# EAGLE board Sequencer-Logic-Prod-V2.1l (EAGLE 9.6.2), part 1 of 2
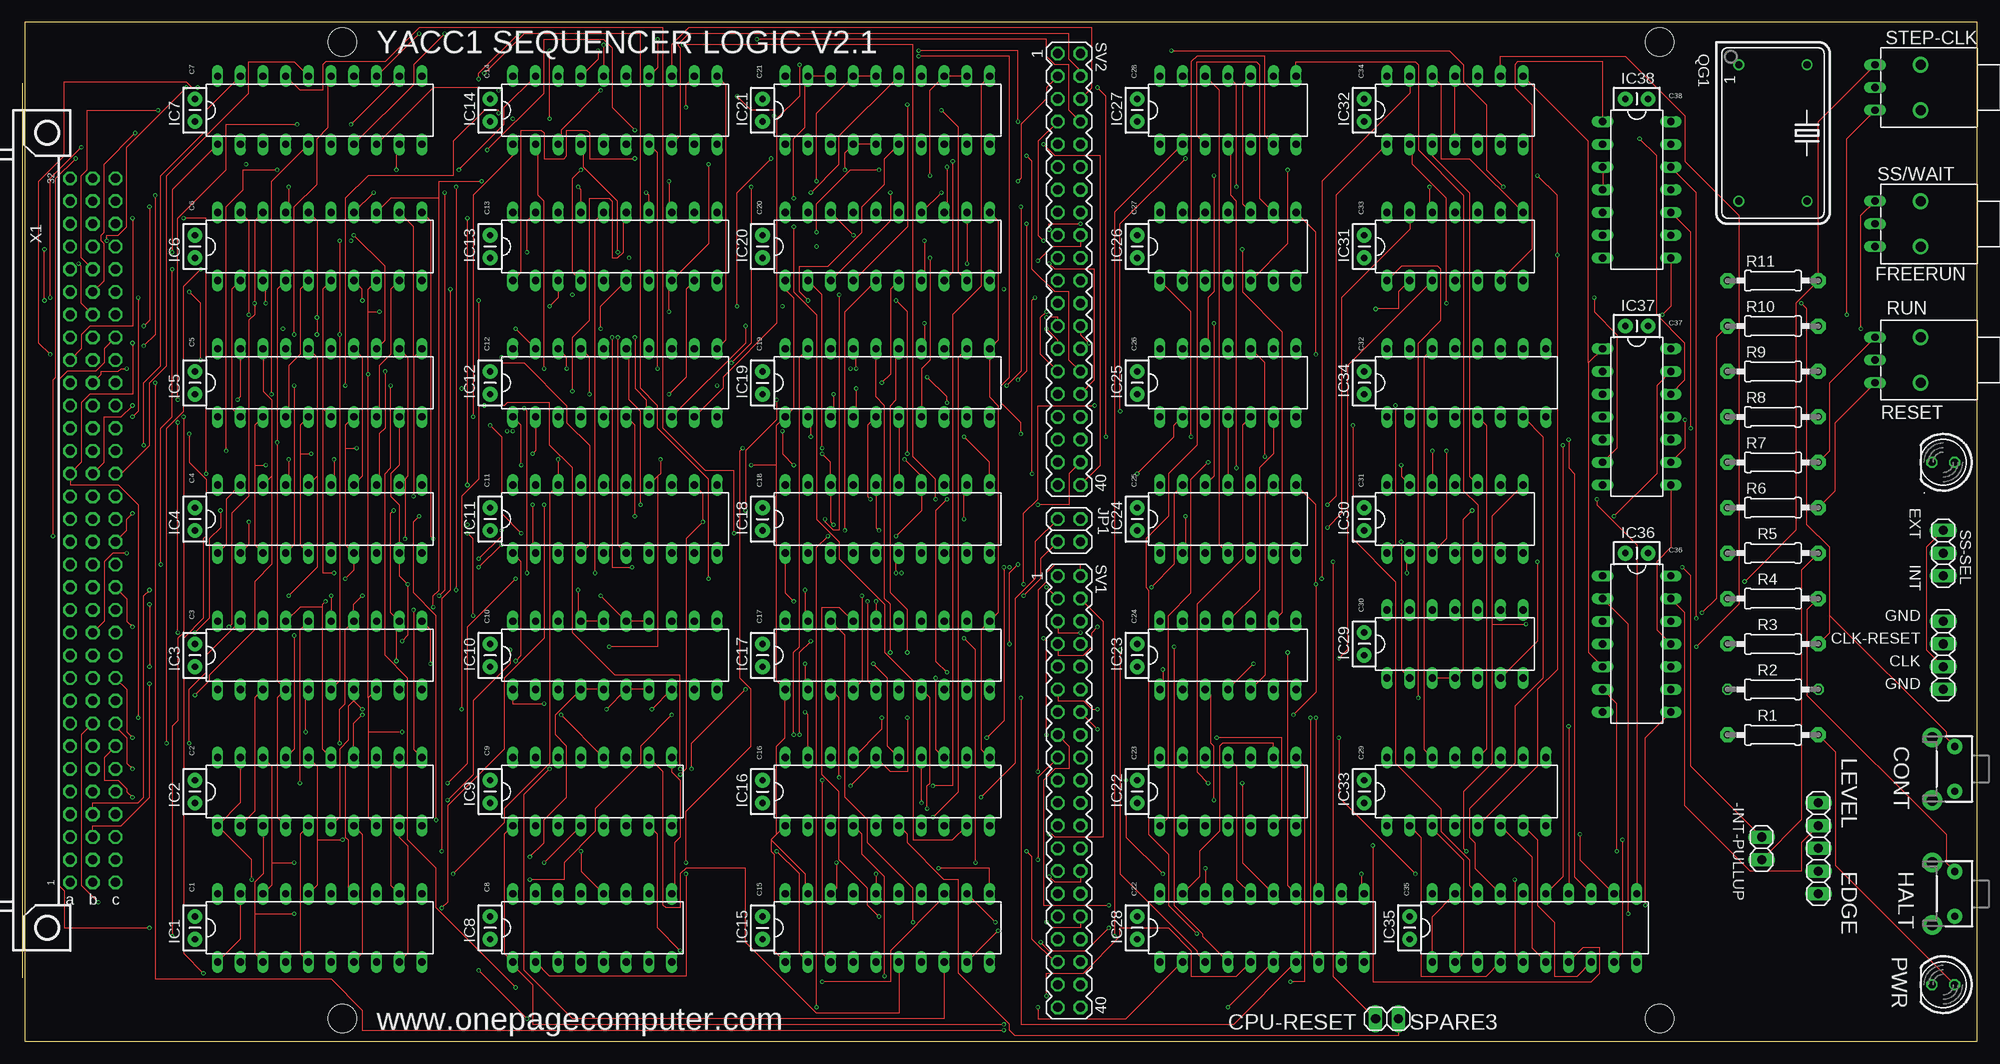
[diagram p0: board, top side]
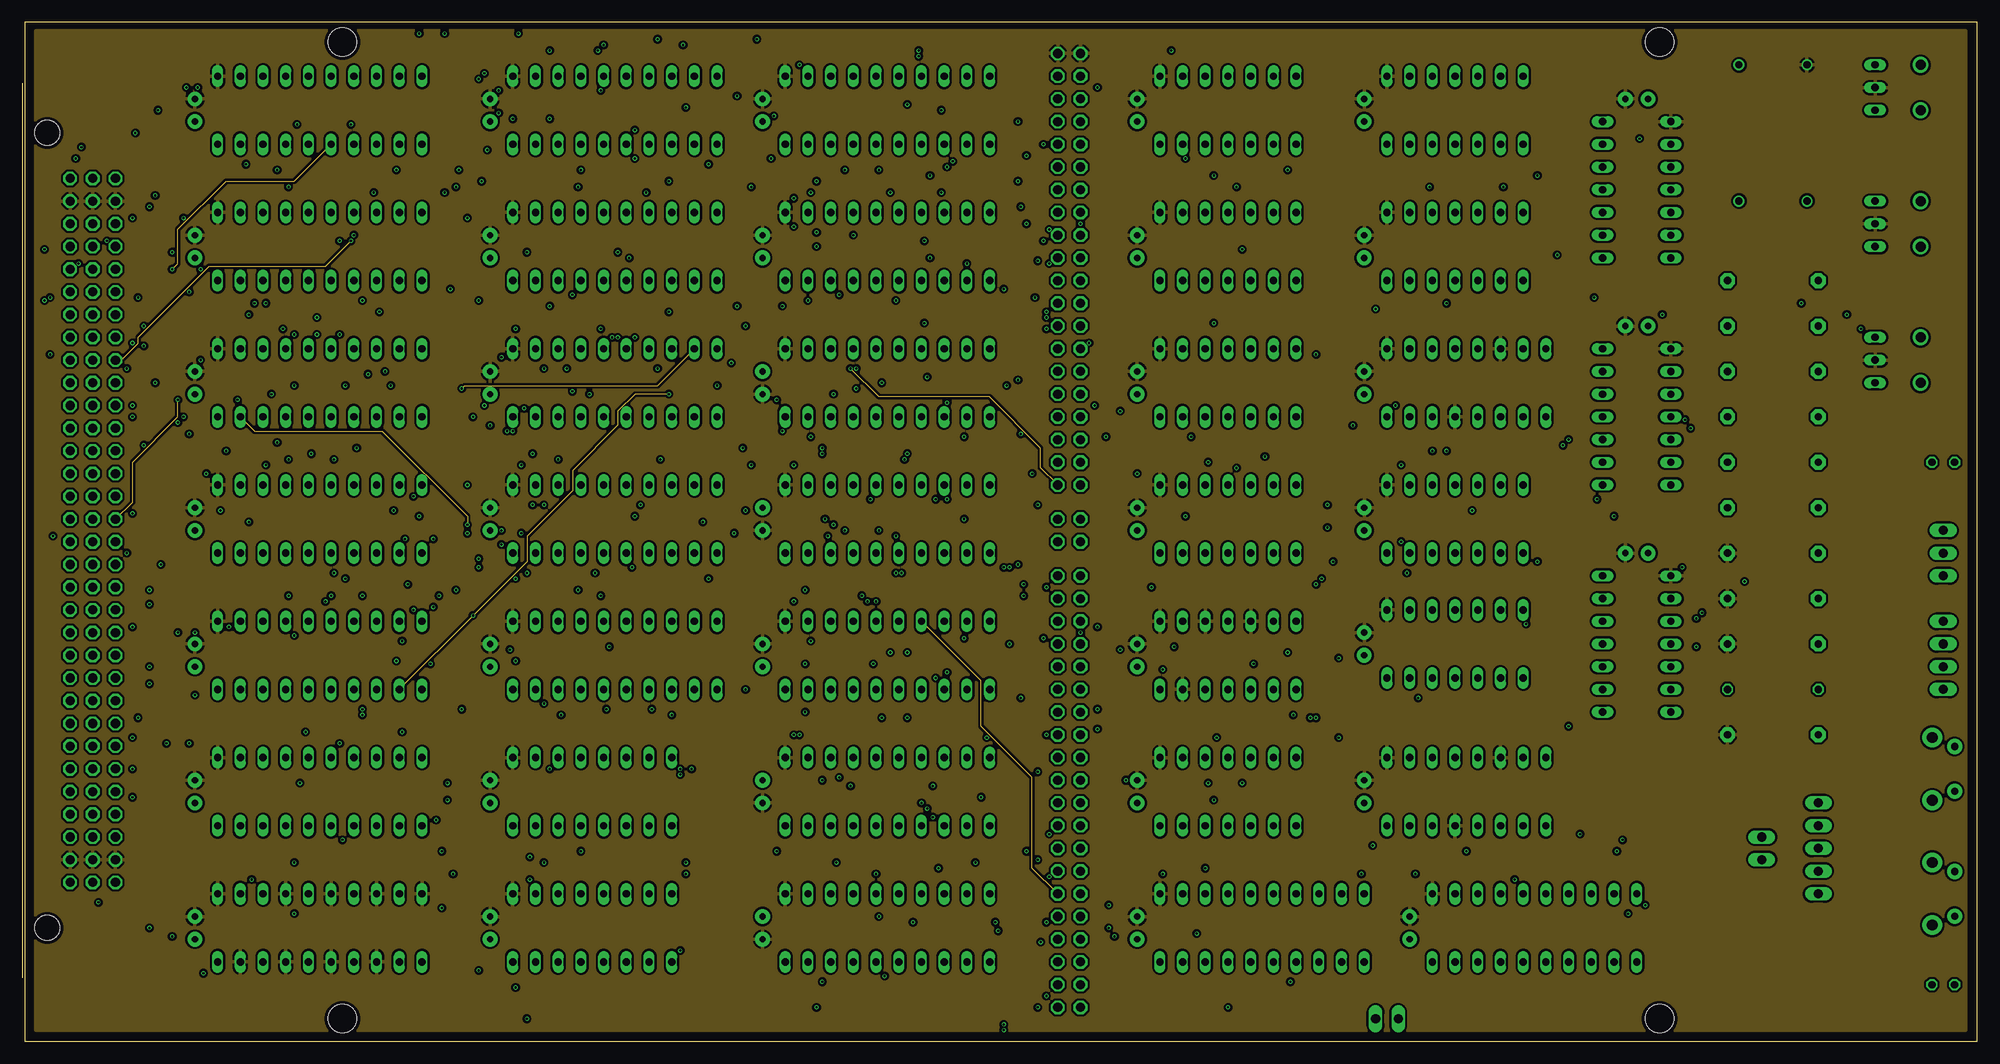
[diagram p1: board, inner layer Route2]
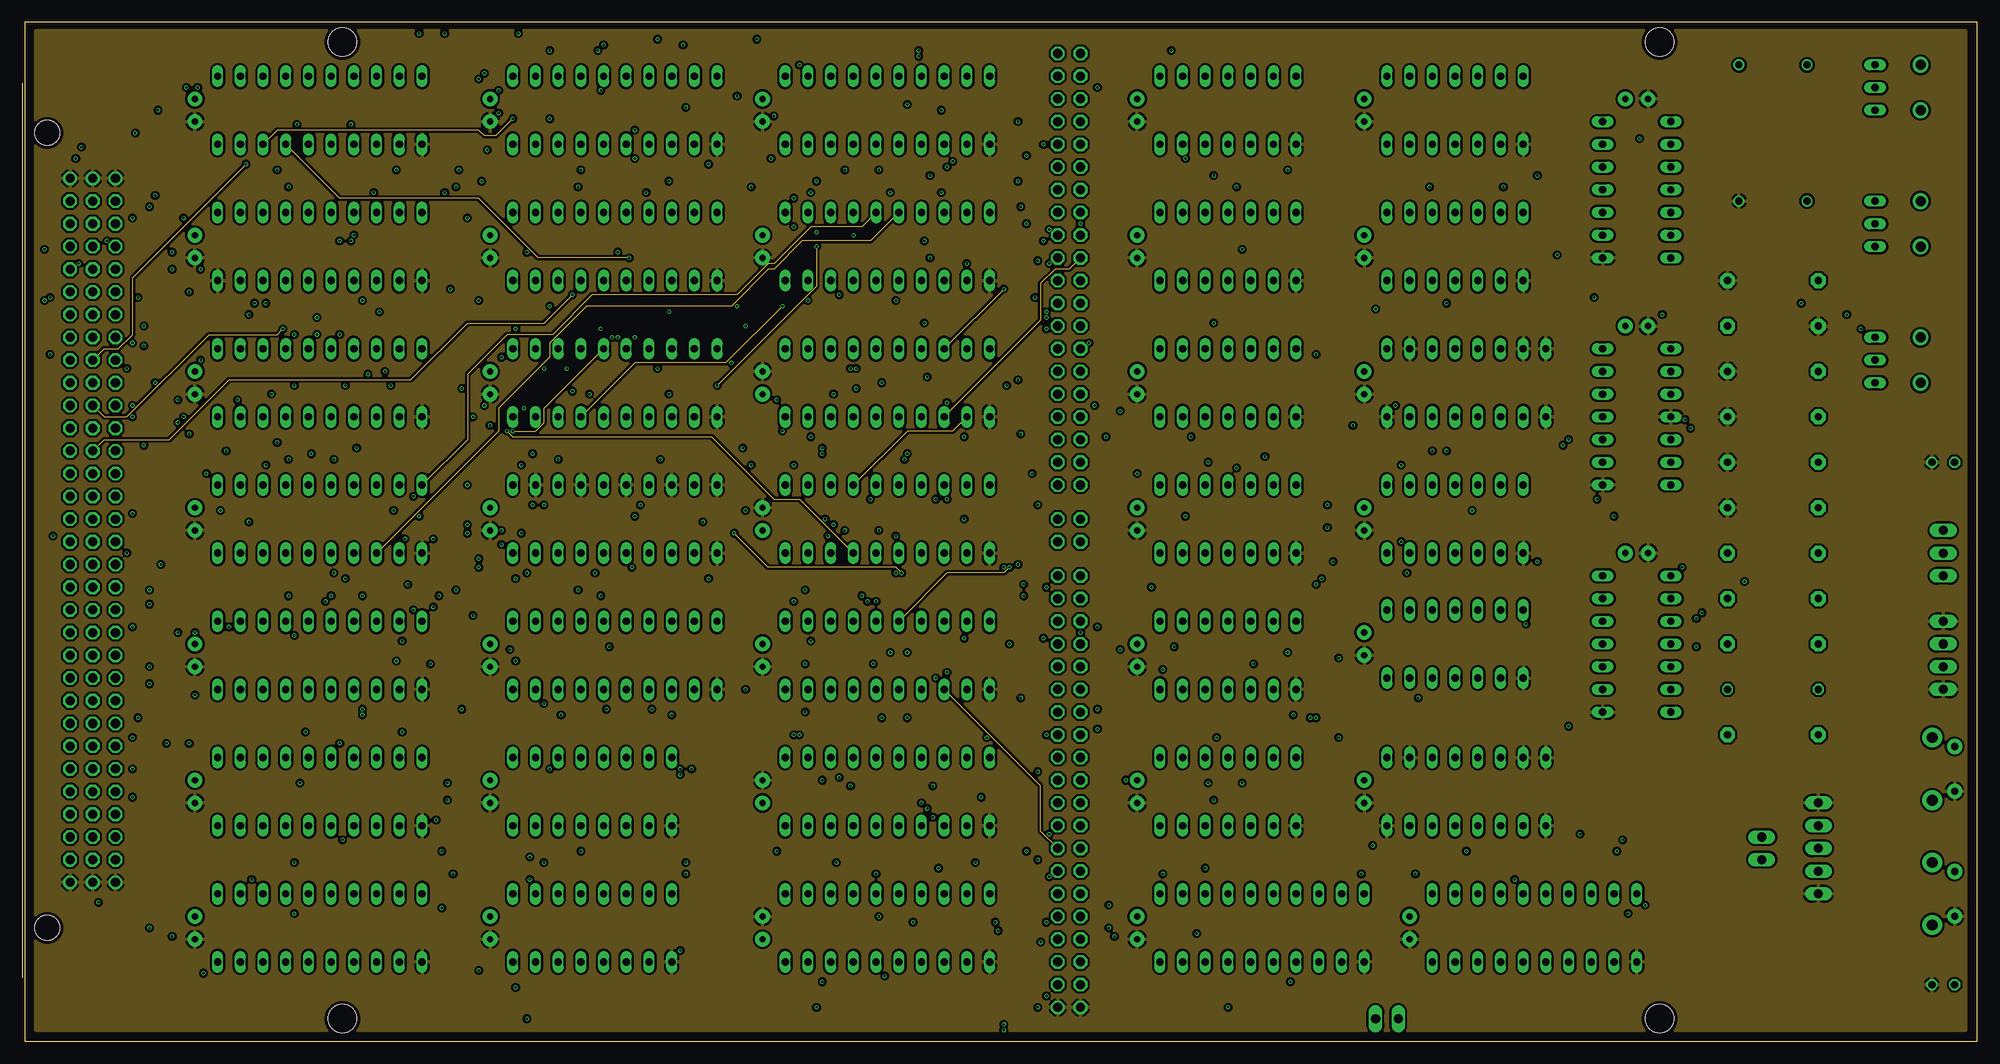
[diagram p2: board, inner layer Route15]
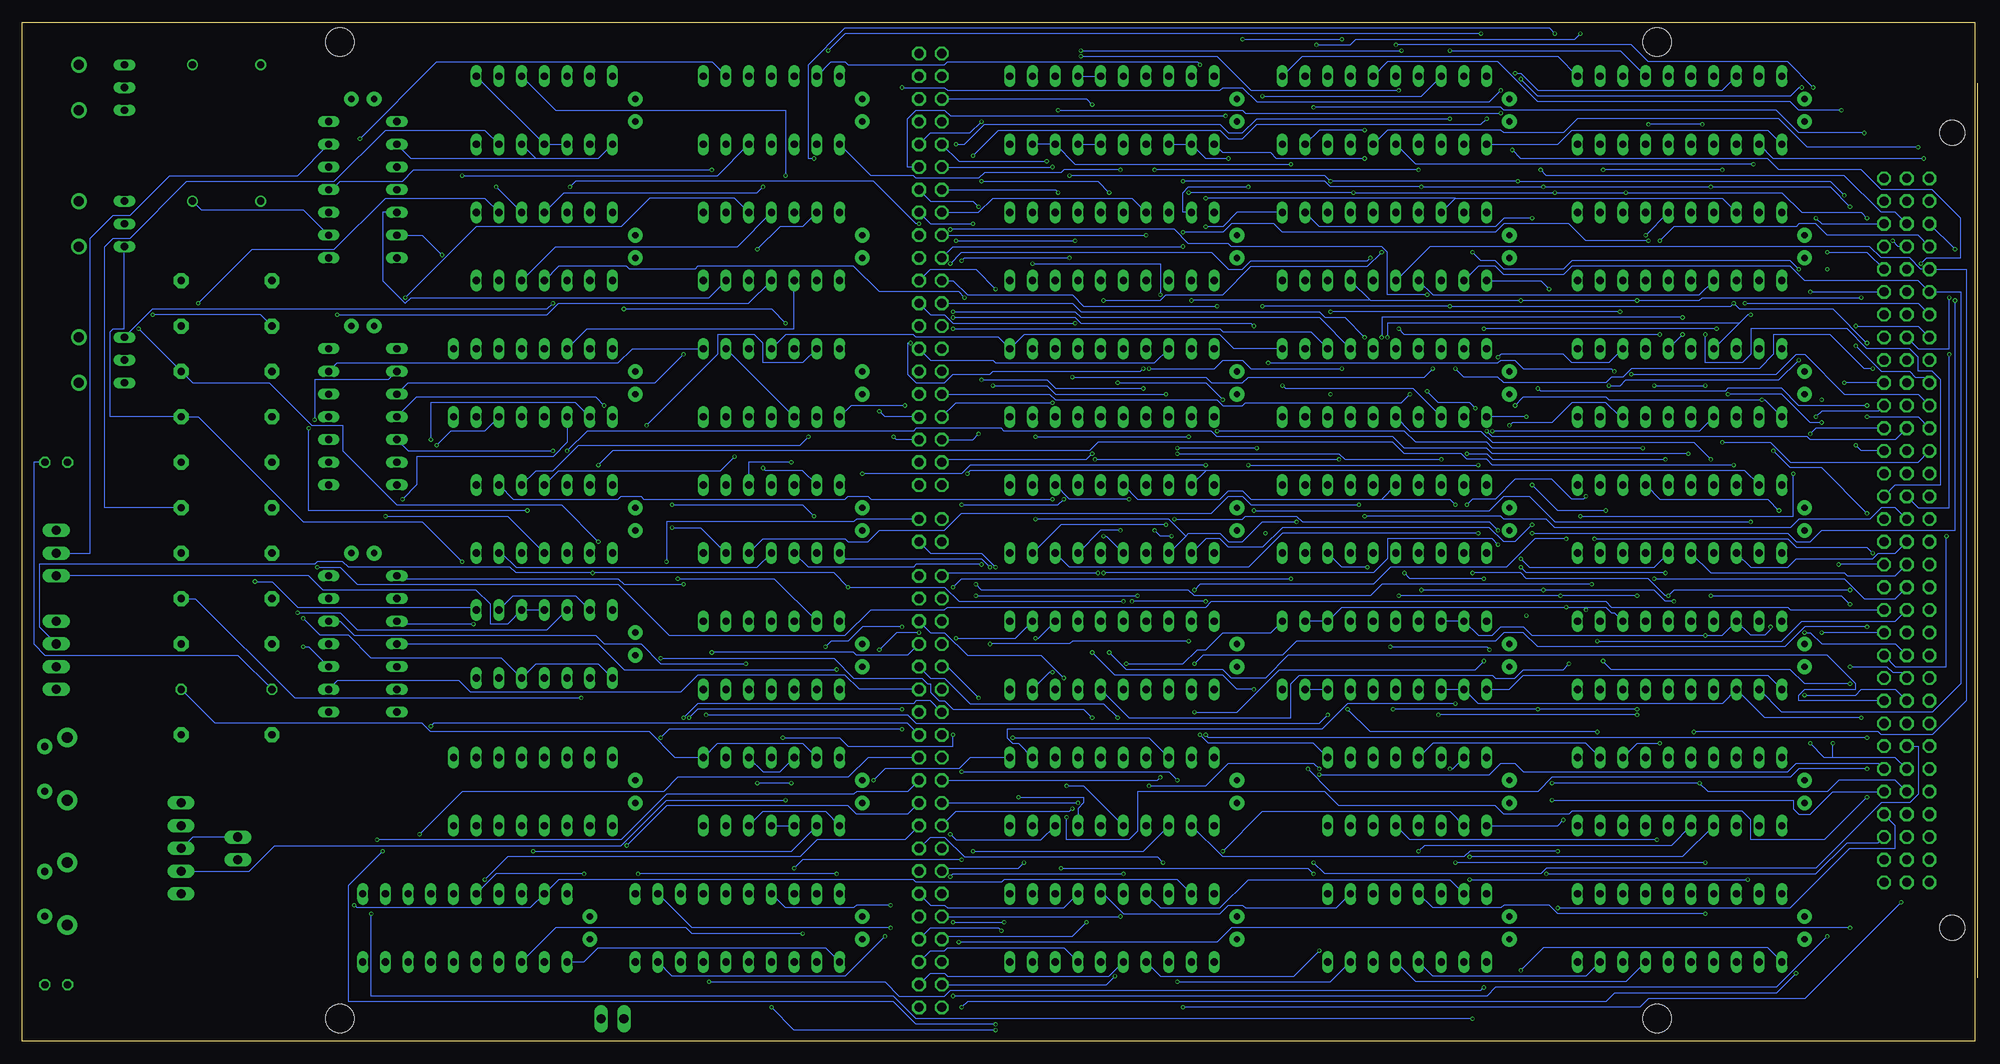
[diagram p3: board, bottom side, seen from below]

Size 218.42 x 113.97 mm. Coordinates in mm from the lower left corner, seen from the top.
Outline: 0,0 218.42,0 218.42,113.97 0,113.97 0,0
Copper layers (1*2*15*16): Top 0.035559375mm / dielectric 0.17018125mm / Route2 0.01778125mm / dielectric 47mil / Route15 0.01778125mm / dielectric 0.17018125mm / Bottom 0.035559375mm
Design rules "oshpark-4layer *": minimum track width 5mil, minimum drill 10mil, track to track 10mil, track to pad 10mil, pad to pad 5mil, via to via 5mil, smd to smd 5mil, copper to edge 15mil, drill to drill 6mil, minimum pad ring 4mil, minimum via ring 4mil, stop-mask expansion 2.5mil, vias tented up to drill 0mil, thermal gap 10mil
Holes 3.2 mm at 35.56,111.76 35.56,2.54 182.88,2.54 182.88,111.76

## Footprints (pad centres in the part's own frame; a part is rotated, then mirrored left to right if it is on the bottom)
1X02 = drill 1.016 long: 1 -1.27,0; 2 1.27,0
LED5MM = drill 0.813 octagon: A -1.27,0; K 1.27,0
CAP-PTH-SMALLEZ = drill 0.7 pad 1.651: 1 0,0; 2 2.54,0
TACTILE-PTH-SIDEEZ = drill 0.8 pad 1.7: 1 -2.5,0; 2 2.5,0 | drill 1.2 pad 2.2: ANCHOR1 -3.5,2.5; ANCHOR2 3.5,2.5
DIL20 = drill 0.813 long: 1 -11.43,-3.81; 2 -8.89,-3.81; 3 -6.35,-3.81; 4 -3.81,-3.81; 5 -1.27,-3.81; 6 1.27,-3.81; 7 3.81,-3.81; 8 6.35,-3.81; 9 8.89,-3.81; 10 11.43,-3.81; 11 11.43,3.81; 12 8.89,3.81; 13 6.35,3.81; 14 3.81,3.81; 15 1.27,3.81; 16 -1.27,3.81; 17 -3.81,3.81; 18 -6.35,3.81; 19 -8.89,3.81; 20 -11.43,3.81
DIL16 = drill 0.813 long: 1 -8.89,-3.81; 2 -6.35,-3.81; 3 -3.81,-3.81; 4 -1.27,-3.81; 5 1.27,-3.81; 6 3.81,-3.81; 7 6.35,-3.81; 8 8.89,-3.81; 9 8.89,3.81; 10 6.35,3.81; 11 3.81,3.81; 12 1.27,3.81; 13 -1.27,3.81; 14 -3.81,3.81; 15 -6.35,3.81; 16 -8.89,3.81
DIL14 = drill 0.813 long: 1 -7.62,-3.81; 2 -5.08,-3.81; 3 -2.54,-3.81; 4 0,-3.81; 5 2.54,-3.81; 6 5.08,-3.81; 7 7.62,-3.81; 8 7.62,3.81; 9 5.08,3.81; 10 2.54,3.81; 11 0,3.81; 12 -2.54,3.81; 13 -5.08,3.81; 14 -7.62,3.81
2X02 = drill 1.016 octagon: 1 -1.27,-1.27; 2 -1.27,1.27; 3 1.27,-1.27; 4 1.27,1.27
1X05 = drill 1.016 long: 1 -5.08,0; 2 -2.54,0; 3 0,0; 4 2.54,0; 5 5.08,0
1X04 = drill 1.016 long: 1 -3.81,0; 2 -1.27,0; 3 1.27,0; 4 3.81,0
DIL14S = drill 0.813: 1 -7.62,-3.81; 7 7.62,-3.81; 8 7.62,3.81; 14 -7.62,3.81
0207/10 = drill 0.813 pad 1.676 octagon: 1 -5.08,0; 2 5.08,0
0207/10' = drill 0.813 octagon: 1 -5.08,0; 2 5.08,0
9070-1W = drill 0.813 long: 1 5.08,-2.54; 2 5.08,0; 3 5.08,2.54 | drill 1.118 pad 1.778: B 0,-2.54; B1 0,2.54
1X03 = drill 1.016 long: 1 -2.54,0; 2 0,0; 3 2.54,0
MA20-2 = drill 1.016 octagon: 1 -24.13,-1.27; 2 -24.13,1.27; 3 -21.59,-1.27; 4 -21.59,1.27; 5 -19.05,-1.27; 6 -19.05,1.27; 7 -16.51,-1.27; 8 -16.51,1.27; 9 -13.97,-1.27; 10 -13.97,1.27; 11 -11.43,-1.27; 12 -11.43,1.27; 13 -8.89,-1.27; 14 -8.89,1.27; 15 -6.35,-1.27; 16 -6.35,1.27; 17 -3.81,-1.27; 18 -3.81,1.27; 19 -1.27,-1.27; 20 -1.27,1.27; 21 1.27,-1.27; 22 1.27,1.27; 23 3.81,-1.27; 24 3.81,1.27; 25 6.35,-1.27; 26 6.35,1.27; 27 8.89,-1.27; 28 8.89,1.27; 29 11.43,-1.27; 30 11.43,1.27; 31 13.97,-1.27; 32 13.97,1.27; 33 16.51,-1.27; 34 16.51,1.27; 35 19.05,-1.27; 36 19.05,1.27; 37 21.59,-1.27; 38 21.59,1.27; 39 24.13,-1.27; 40 24.13,1.27
FABC96R = drill 1.016 octagon: A1 -2.54,39.37; A2 -2.54,36.83; A3 -2.54,34.29; A4 -2.54,31.75; A5 -2.54,29.21; A6 -2.54,26.67; A7 -2.54,24.13; A8 -2.54,21.59; A9 -2.54,19.05; A10 -2.54,16.51; A11 -2.54,13.97; A12 -2.54,11.43; A13 -2.54,8.89; A14 -2.54,6.35; A15 -2.54,3.81; A16 -2.54,1.27; A17 -2.54,-1.27; A18 -2.54,-3.81; A19 -2.54,-6.35; A20 -2.54,-8.89; A21 -2.54,-11.43; A22 -2.54,-13.97; A23 -2.54,-16.51; A24 -2.54,-19.05; A25 -2.54,-21.59; A26 -2.54,-24.13; A27 -2.54,-26.67; A28 -2.54,-29.21; A29 -2.54,-31.75; A30 -2.54,-34.29; A31 -2.54,-36.83; A32 -2.54,-39.37; B1 -5.08,39.37; B2 -5.08,36.83; B3 -5.08,34.29; B4 -5.08,31.75; B5 -5.08,29.21; B6 -5.08,26.67; B7 -5.08,24.13; B8 -5.08,21.59; B9 -5.08,19.05; B10 -5.08,16.51; B11 -5.08,13.97; B12 -5.08,11.43; B13 -5.08,8.89; B14 -5.08,6.35; B15 -5.08,3.81; B16 -5.08,1.27; B17 -5.08,-1.27; B18 -5.08,-3.81; B19 -5.08,-6.35; B20 -5.08,-8.89; B21 -5.08,-11.43; B22 -5.08,-13.97; B23 -5.08,-16.51; B24 -5.08,-19.05; B25 -5.08,-21.59; B26 -5.08,-24.13; B27 -5.08,-26.67; B28 -5.08,-29.21; B29 -5.08,-31.75; B30 -5.08,-34.29; B31 -5.08,-36.83; B32 -5.08,-39.37; C1 -7.62,39.37; C2 -7.62,36.83; C3 -7.62,34.29; C4 -7.62,31.75; C5 -7.62,29.21; C6 -7.62,26.67; C7 -7.62,24.13; C8 -7.62,21.59; C9 -7.62,19.05; C10 -7.62,16.51; C11 -7.62,13.97; C12 -7.62,11.43; C13 -7.62,8.89; C14 -7.62,6.35; C15 -7.62,3.81; C16 -7.62,1.27; C17 -7.62,-1.27; C18 -7.62,-3.81; C19 -7.62,-6.35; C20 -7.62,-8.89; C21 -7.62,-11.43; C22 -7.62,-13.97; C23 -7.62,-16.51; C24 -7.62,-19.05; C25 -7.62,-21.59; C26 -7.62,-24.13; C27 -7.62,-26.67; C28 -7.62,-29.21; C29 -7.62,-31.75; C30 -7.62,-34.29; C31 -7.62,-36.83; C32 -7.62,-39.37 | hole 2.794: 0,-44.456; 0,44.456

## Placement (x,y rotation side)
-INT-PULLUP  [1X02]  194.31,21.59 90 top
.  OUT  [LED5MM]  214.63,64.77 180 top
C1  .1  [CAP-PTH-SMALLEZ]  19.05,13.97 270 top
C2  .1  [CAP-PTH-SMALLEZ]  19.05,29.21 270 top
C3  .1  [CAP-PTH-SMALLEZ]  19.05,44.45 270 top
C4  .1  [CAP-PTH-SMALLEZ]  19.05,59.69 270 top
C5  .1  [CAP-PTH-SMALLEZ]  19.05,74.93 270 top
C6  .1  [CAP-PTH-SMALLEZ]  19.05,90.17 270 top
C7  .1  [CAP-PTH-SMALLEZ]  19.05,105.41 270 top
C8  .1  [CAP-PTH-SMALLEZ]  52.07,13.97 270 top
C9  .1  [CAP-PTH-SMALLEZ]  52.07,29.21 270 top
C10  .1  [CAP-PTH-SMALLEZ]  52.07,44.45 270 top
C11  .1  [CAP-PTH-SMALLEZ]  52.07,59.69 270 top
C12  .1  [CAP-PTH-SMALLEZ]  52.07,74.93 270 top
C13  .1  [CAP-PTH-SMALLEZ]  52.07,90.17 270 top
C14  .1  [CAP-PTH-SMALLEZ]  52.07,105.41 270 top
C15  .1  [CAP-PTH-SMALLEZ]  82.55,11.43 90 top
C16  .1  [CAP-PTH-SMALLEZ]  82.55,26.67 90 top
C17  .1  [CAP-PTH-SMALLEZ]  82.55,44.45 270 top
C18  .1  [CAP-PTH-SMALLEZ]  82.55,57.15 90 top
C19  .1  [CAP-PTH-SMALLEZ]  82.55,72.39 90 top
C20  .1  [CAP-PTH-SMALLEZ]  82.55,90.17 270 top
C21  .1  [CAP-PTH-SMALLEZ]  82.55,105.41 270 top
C22  .1  [CAP-PTH-SMALLEZ]  124.46,13.97 270 top
C23  .1  [CAP-PTH-SMALLEZ]  124.46,29.21 270 top
C24  .1  [CAP-PTH-SMALLEZ]  124.46,44.45 270 top
C25  .1  [CAP-PTH-SMALLEZ]  124.46,59.69 270 top
C26  .1  [CAP-PTH-SMALLEZ]  124.46,74.93 270 top
C27  .1  [CAP-PTH-SMALLEZ]  124.46,90.17 270 top
C28  .1  [CAP-PTH-SMALLEZ]  124.46,105.41 270 top
C29  .1  [CAP-PTH-SMALLEZ]  149.86,29.21 270 top
C30  .1  [CAP-PTH-SMALLEZ]  149.86,45.72 270 top
C31  .1  [CAP-PTH-SMALLEZ]  149.86,59.69 270 top
C32  .1  [CAP-PTH-SMALLEZ]  149.86,74.93 270 top
C33  .1  [CAP-PTH-SMALLEZ]  149.86,90.17 270 top
C34  .1  [CAP-PTH-SMALLEZ]  149.86,105.41 270 top
C35  .1  [CAP-PTH-SMALLEZ]  154.94,13.97 270 top
C36  .1  [CAP-PTH-SMALLEZ]  179.07,54.61 0 top
C37  .1  [CAP-PTH-SMALLEZ]  179.07,80.01 0 top
C38  .1  [CAP-PTH-SMALLEZ]  179.07,105.41 0 top
CONT  SWITCH-MOMENTARY-2SIDE_EZ  [TACTILE-PTH-SIDEEZ]  215.9,30.48 90 top
HALT  SWITCH-MOMENTARY-2SIDE_EZ  [TACTILE-PTH-SIDEEZ]  215.9,16.51 90 top
IC1  74LS244N  [DIL20]  33.02,12.7 0 top
IC2  74LS244N  [DIL20]  33.02,27.94 0 top
IC3  74LS374N  [DIL20]  33.02,43.18 0 top
IC4  74LS244N  [DIL20]  33.02,58.42 0 top
IC5  74LS244N  [DIL20]  33.02,73.66 0 top
IC6  74LS374N  [DIL20]  33.02,88.9 0 top
IC7  74LS374N  [DIL20]  33.02,104.14 0 top
IC8  74LS175N  [DIL16]  63.5,12.7 0 top
IC9  74LS175N  [DIL16]  63.5,27.94 0 top
IC10  74LS374N  [DIL20]  66.04,43.18 0 top
IC11  74LS244N  [DIL20]  66.04,58.42 0 top
IC12  74LS374N  [DIL20]  66.04,73.66 0 top
IC13  74LS374N  [DIL20]  66.04,88.9 0 top
IC14  74LS374N  [DIL20]  66.04,104.14 0 top
IC15  74LS244N  [DIL20]  96.52,12.7 0 top
IC16  74LS374N  [DIL20]  96.52,27.94 0 top
IC17  74LS374N  [DIL20]  96.52,43.18 0 top
IC18  74LS244N  [DIL20]  96.52,58.42 0 top
IC19  74LS374N  [DIL20]  96.52,73.66 0 top
IC20  74LS374N  [DIL20]  96.52,88.9 0 top
IC21  74LS374N  [DIL20]  96.52,104.14 0 top
IC22  74ALS02N  [DIL14]  134.62,27.94 0 top
IC23  74LS74N  [DIL14]  134.62,43.18 0 top
IC24  74LS08N  [DIL14]  134.62,58.42 0 top
IC25  74LS32N  [DIL14]  134.62,73.66 0 top
IC26  74LS32N  [DIL14]  134.62,88.9 0 top
IC27  74LS08N  [DIL14]  134.62,104.14 0 top
IC28  74LS374N  [DIL20]  138.43,12.7 0 top
IC29  74ALS02N  [DIL14]  160.02,44.45 0 top
IC30  74LS32N  [DIL14]  160.02,58.42 0 top
IC31  74LS04N  [DIL14]  160.02,88.9 0 top
IC32  74ALS02N  [DIL14]  160.02,104.14 0 top
IC33  74LS192N  [DIL16]  161.29,27.94 0 top
IC34  74LS192N  [DIL16]  161.29,73.66 0 top
IC35  74LS244N  [DIL20]  168.91,12.7 0 top
IC36  74LS04N  [DIL14]  180.34,44.45 270 top
IC37  74LS04N  [DIL14]  180.34,69.85 270 top
IC38  74LS08N  [DIL14]  180.34,95.25 270 top
JP1  [2X02]  116.84,57.15 270 top
JP2  PINHD-1X2  [1X02]  152.4,2.54 0 top
JP3  [1X05]  200.66,21.59 90 top
JP4  PINHD-1X4  [1X04]  214.63,43.18 90 top
PWR  [LED5MM]  214.63,6.35 180 top
QG1  [DIL14S]  195.58,101.6 270 top
R1  10k  [0207/10]  195.58,34.29 180 top
R2  330  [0207/10']  195.58,39.37 0 top
R3  10k  [0207/10]  195.58,44.45 180 top
R4  10k  [0207/10]  195.58,49.53 180 top
R5  10k  [0207/10]  195.58,54.61 0 top
R6  10k  [0207/10]  195.58,59.69 180 top
R7  10k  [0207/10]  195.58,64.77 0 top
R8  10k  [0207/10]  195.58,69.85 180 top
R9  10k  [0207/10]  195.58,74.93 0 top
R10  10k  [0207/10]  195.58,80.01 0 top
R11  10k  [0207/10]  195.58,85.09 0 top
RESET  [9070-1W]  212.09,76.2 180 top
SS-SEL  [1X03]  214.63,54.61 90 top
SS/WAIT  [9070-1W]  212.09,91.44 180 top
STEP-CLK  [9070-1W]  212.09,106.68 180 top
SV1  [MA20-2]  116.84,27.94 270 top
SV2  [MA20-2]  116.84,86.36 270 top
X1  FABC96R  [FABC96R]  2.54,57.15 180 top

## Library data of the parts
-INT-PULLUP JP1 JP3 SS-SEL = pinhead
. PWR = led
C1-C38 = SparkFun-Capacitors
CONT HALT = SparkFun-Electromechanical
IC1-IC38 = 74xx-us
JP2 JP4 = Connector; CATEGORY: CONNECTOR; SUB-CATEGORY: PIN-HEADER
QG1 = crystal; OC_FARNELL: unknown; OC_NEWARK: unknown
R1 R3-R11 = adafruit
R2 = eagle-ltspice; SPICEMODEL: NONE; SPICEPREFIX: R
RESET SS/WAIT STEP-CLK = switch
SV1 SV2 = con-lstb; OC_FARNELL: unknown; OC_NEWARK: unknown
X1 = con-vg

## Nets
-2-BYTE-OPERAND-SEL: IC5.1 IC5.19 IC16.16 IC31.3
-AC-LD: IC28.5 X1.C22
-AC-LD-INV: IC7.19 X1.C20
-AC-RD: IC28.2 X1.C21
-ALU-FUNC: IC7.6 X1.C15
-BRANCH-RD: IC13.1 IC16.2 IC21.1
-BUS-EN: IC7.1 IC12.1 IC14.1 IC15.1 IC15.19 IC16.1 IC17.1 IC19.1 IC20.1 IC28.1 IC35.1 IC35.19 IC36.8 X1.C28
-DO-INT: IC1.1 IC1.19 IC36.2
-FP-HALT: HALT.2 IC31.1 R4.1
-HALT-CONT: CONT.2 IC31.9 R3.1
-HL-SWAP: IC28.12 X1.C25
-INT: -INT-PULLUP.2 JP3.3 X1.C13
-INT-JMP: IC3.1 IC10.1 IC16.12
-INTA: IC17.2 X1.C14
-IO-ADDR-LD: IC7.2 X1.C11
-IO-RD: IC14.6 X1.B25
-IO-WR: IC14.9 X1.B26
-MEM-CPU-RESET: JP1.2 JP2.1
-MEM-RD: IC14.2 X1.B23
-MEM-WR: IC14.5 X1.B24
-ONE-OPERAND-SEL: IC4.1 IC4.19 IC18.19 IC31.4
-REG-DN: IC12.16 X1.B21
-REG-FUNC-LD: IC20.5 X1.B8
-REG-FUNC-RD: IC20.2 X1.B7
-REG-LD-HI: IC31.12 X1.B20
-REG-LD-LO: IC31.10 X1.B18
-REG-RD-HI: IC12.12 X1.B19
-REG-RD-LO: IC12.6 X1.B17
-REG-UP: IC12.19 X1.B22
-RESET: IC8.1 IC9.1 IC36.6 X1.C30
-RUN: X1.C29
-SR-LD: IC28.6 X1.C23
-TMP-REG-LD0: IC14.15 X1.B28
-TMP-REG-LD1: IC14.19 X1.B30
-TMP-REG-RD0: IC14.12 X1.B27
-TMP-REG-RD1: IC14.16 X1.B29
-VMA: IC7.5 X1.C12
ADDR0: X1.A3
ADDR1: X1.A4
ADDR2: X1.A5
ADDR3: X1.A6
ADDR4: X1.A7
ADDR5: X1.A8
ADDR6: X1.A9
ADDR7: X1.A10
ADDR8: X1.A11
ADDR9: X1.A12
ADDR10: X1.A13
ADDR11: X1.A14
ADDR12: X1.A15
ADDR13: X1.A16
ADDR14: X1.A17
ADDR15: X1.A18
ADDR-REG-ID0: IC11.18 IC18.9 IC18.18 X1.C3
ADDR-REG-ID1: IC11.16 IC18.7 IC18.16 X1.C4
ADDR-REG-ID2: IC11.14 IC18.5 IC18.14 X1.C5
ADDR-REG-ID3: IC11.12 IC18.3 IC18.12 X1.C6
ALU0: IC7.9 X1.C16
ALU1: IC7.12 X1.C17
ALU2: IC7.15 X1.C18
ALU3: IC7.16 X1.C19
BR-COND: IC27.1 X1.C24
BR-TEST: IC27.2 IC28.9
BRANCH-LD-HI: IC13.11 IC16.9
BRANCH-LD-LO: IC16.5 IC21.11
BUS-LATCH-CLK: IC7.11 IC12.11 IC14.11 IC16.11 IC17.11 IC19.11 IC20.11 IC25.11 IC28.11
CADDR0: IC35.16 SV1.14
CADDR1: IC35.14 SV1.16
CADDR2: IC35.12 SV1.18
CADDR3: IC35.9 SV1.20
CADDR4: IC35.7 SV1.22
CADDR5: IC35.5 SV1.24
CADDR6: IC15.18 SV1.26
CADDR7: IC15.16 SV1.28
CADDR8: IC15.14 SV1.30
CADDR9: IC15.12 SV1.32
CADDR10: IC15.9 SV1.34
CADDR11: IC15.7 SV1.36
CADDR12: IC15.5 SV1.38
CADDR13: IC15.3 SV1.2
CNT-CLK: IC25.13 IC35.18
COUNT-FAULT: IC26.12 IC35.3
COUNT-RESET: IC26.3 IC33.14 IC34.14
DATA0: IC2.2 IC3.3 IC6.3 IC10.2 IC10.3 IC13.3 IC21.2 IC21.3 X1.A19
DATA1: IC2.4 IC3.4 IC6.4 IC10.4 IC10.5 IC13.4 IC21.4 IC21.5 X1.A20
DATA2: IC2.6 IC3.7 IC6.7 IC10.6 IC10.7 IC13.7 IC21.6 IC21.7 X1.A21
DATA3: IC2.8 IC3.8 IC6.8 IC10.8 IC10.9 IC13.8 IC21.8 IC21.9 X1.A22
DATA4: IC2.11 IC3.13 IC6.13 IC10.12 IC10.13 IC13.13 IC21.12 IC21.13 X1.A23
DATA5: IC2.13 IC3.14 IC6.14 IC10.14 IC10.15 IC13.14 IC21.14 IC21.15 X1.A24
DATA6: IC2.15 IC3.17 IC6.17 IC10.16 IC10.17 IC13.17 IC21.16 IC21.17 X1.A25
DATA7: IC2.17 IC3.18 IC6.18 IC10.18 IC10.19 IC13.18 IC21.18 IC21.19 X1.A26
DATA8: IC3.2 IC13.2 X1.A27
DATA9: IC3.5 IC13.5 X1.A28
DATA10: IC3.6 IC13.6 X1.A29
DATA11: IC3.9 IC13.9 X1.A30
DATA12: IC3.12 IC13.12 X1.B3
DATA13: IC3.15 IC13.15 X1.B4
DATA14: IC3.16 IC13.16 X1.B5
DATA15: IC3.19 IC13.19 X1.B6
DEST-ADDR: IC11.1 IC16.19
DO-HALT: IC23.9 IC26.13
DO-INT: IC2.1 IC2.19 IC24.8 IC36.1
EXTERNAL-SINGLESTEP-CLK: JP4.2 SS-SEL.3
FP-CLKH: IC29.12 R10.1 STEP-CLK.3
FP-CLKL: IC29.8 R11.2 STEP-CLK.1
FP-EXECUTE: IC32.6 R6.1 RESET.3
FP-FREERUN: IC29.2 R9.2 SS/WAIT.1
FP-HALT: IC24.12 IC31.2
FP-HALT-CONT: IC31.8 IC32.12
FP-RESET: IC32.2 R7.2 RESET.1
FP-SINGLE-STEP-CLK: IC29.10 IC29.11 SS-SEL.1
FP-SS: IC29.6 R8.1 SS/WAIT.3
FREE-RUN: IC29.3 IC29.4 IC38.10
GND: ..K C1.2 C2.2 C3.2 C4.2 C5.2 C6.2 C7.2 C8.2 C9.2 C10.2 C11.2 C12.2 C13.2 C14.2 C15.2 C16.2 C17.2 C18.2 C19.2 C20.2 C21.2 C22.2 C23.2 C24.2 C25.2 C26.2 C27.2 C28.2 C29.2 C30.2 C31.2 C32.2 C33.2 C34.2 C35.2 C36.2 C37.2 C38.2 CONT.1 HALT.1 IC1.10 IC2.10 IC3.10 IC4.10 IC5.10 IC6.1 IC6.10 IC7.10 IC8.8 IC9.8 IC10.10 IC11.10 IC11.11 IC11.13 IC11.15 IC11.17 IC11.19 IC12.10 IC13.10 IC14.10 IC15.10 IC16.10 IC17.10 IC18.10 IC19.10 IC20.10 IC21.10 IC22.7 IC23.7 IC24.7 IC25.7 IC26.7 IC27.7 IC28.10 IC29.7 IC30.7 IC31.7 IC32.7 IC33.1 IC33.8 IC33.9 IC33.10 IC33.15 IC34.1 IC34.8 IC34.9 IC34.10 IC34.15 IC35.10 IC36.7 IC37.7 IC37.11 IC38.7 JP3.1 JP3.5 JP4.1 JP4.4 PWR.K QG1.7 R6.2 R7.1 R8.2 R9.1 R10.2 R11.1 SV1.39 SV1.40 X1.A1 X1.A32 X1.B1 X1.B32 X1.C1 X1.C32
HALT-CLR: IC23.13 IC32.13
HARD-RESET1: IC29.9 IC29.13
IN: X1.C26
INT-EDGE: IC23.3 JP3.2
INT-EN: IC17.12 IC22.6
INT-LD-HI: IC3.11 IC17.6
INT-LD-LO: IC10.11 IC16.15
INT-LEVEL: IC36.13 JP3.4
INT-START: IC17.9 IC30.9
IO-ADDR0: IC19.12 X1.C7
IO-ADDR1: IC19.15 X1.C8
IO-ADDR2: IC19.16 X1.C9
IO-ADDR3: IC19.19 X1.C10
LADDR-REG-ID0: IC18.11 IC19.2
LADDR-REG-ID1: IC18.13 IC19.5
LADDR-REG-ID2: IC18.15 IC19.6
LADDR-REG-ID3: IC18.17 IC19.9
LD-INS-REG: IC17.15 IC24.1
LD-INS-REG1: IC8.9 IC9.9 IC24.3
LREG-LD-HI: IC12.15 IC24.5
LREG-LD-ID0: IC4.11 IC20.16
LREG-LD-ID1: IC4.13 IC20.19
LREG-LD-ID2: IC4.15 IC12.2
LREG-LD-ID3: IC4.17 IC12.5
LREG-LD-LO: IC12.9 IC27.13
LREG-RD-ID0: IC4.2 IC20.6
LREG-RD-ID1: IC4.4 IC20.9
LREG-RD-ID2: IC4.6 IC20.12
LREG-RD-ID3: IC4.8 IC20.15
N$1: IC33.12 IC34.5
N$2: IC9.2 IC15.2
N$3: IC9.7 IC15.4
N$4: IC27.5 IC33.5 IC38.6
N$5: IC1.18 IC2.18 IC9.4
N$6: IC1.16 IC2.16 IC9.5
N$7: IC33.3 IC35.2
N$8: IC33.2 IC35.4
N$9: IC33.6 IC35.6
N$10: IC9.10 IC15.6
N$11: IC33.7 IC35.8
N$12: IC34.3 IC35.11
N$13: IC34.2 IC35.13
N$14: IC34.6 IC35.15
N$15: IC34.7 IC35.17
N$16: IC31.6 IC38.1
N$17: IC1.14 IC2.14 IC9.12
N$18: IC1.12 IC2.12 IC9.13
N$19: IC1.9 IC2.9 IC8.4
N$20: IC1.7 IC2.7 IC8.5
N$21: IC1.5 IC2.5 IC8.12
N$22: IC1.3 IC2.3 IC8.13
N$23: IC9.15 IC15.8
N$24: IC22.1 IC22.5 IC24.10
N$25: IC22.3 IC22.4
N$26: IC26.11 IC31.5
N$27: IC22.2 IC30.8 IC36.3
N$28: IC23.5 IC24.9
N$29: IC23.1 IC36.4
N$30: PWR.A R1.1
N$31: IC38.3 IC38.4
N$32: IC25.12 IC32.10
N$33: IC23.11 IC25.6
N$34: IC8.2 IC15.11
N$35: IC8.7 IC15.13
N$36: IC8.10 IC15.15
N$37: IC8.15 IC15.17
N$38: IC26.5 IC38.11
N$39: IC26.4 IC38.8
N$40: IC38.9 QG1.8
N$41: IC23.4 IC36.12
N$42: IC36.11 IC37.8
N$44: IC37.2 IC37.9
N$45: IC25.3 IC25.9
N$46: IC32.9 IC36.10
N$47: IC25.10 IC30.11
N$48: IC22.10 IC22.12
N$49: -INT-PULLUP.1 R5.2
N$51: IC27.9 IC37.12
N$52: IC27.8 IC30.5
N$53: IC24.4 IC27.12 IC30.6
N$54: IC24.11 IC25.4
N$55: IC26.2 IC27.6
N$56: IC25.8 IC30.4 IC37.13
N$57: IC27.11 IC31.11
N$58: IC24.6 IC31.13
N$59: ..A R2.1
N$60: IC26.8 IC37.3
N$61: IC5.17 IC6.19 IC11.8
N$62: IC5.2 IC6.2 IC18.2
N$63: IC5.4 IC6.5 IC18.4
N$64: IC5.6 IC6.6 IC18.6
N$65: IC5.8 IC6.9 IC18.8
N$66: IC5.11 IC6.12 IC11.2
N$67: IC30.3 IC37.5
N$68: IC5.13 IC6.15 IC11.4
N$69: IC5.15 IC6.16 IC11.6
N$70: IC30.1 IC37.4
N$71: IC26.10 IC27.10 IC37.6
N$72: IC26.9 IC27.3
OPERAND-CLK: IC6.11 IC17.19
OUT: IC22.8 IC22.13 R2.2 X1.C27
OUT-OFF: IC22.11 IC28.16
OUT-ON: IC22.9 IC28.19
READY: IC36.9 SV1.12
REG-LD-ID0: IC4.9 IC5.9 IC25.1 X1.B13
REG-LD-ID1: IC4.7 IC5.7 IC25.2 X1.B14
REG-LD-ID2: IC4.5 IC5.5 IC30.12 X1.B15
REG-LD-ID3: IC4.3 IC5.3 IC30.13 X1.B16
REG-RD-ID0: IC4.18 IC5.18 X1.B9
REG-RD-ID1: IC4.16 IC5.16 X1.B10
REG-RD-ID2: IC4.14 IC5.14 X1.B11
REG-RD-ID3: IC4.12 IC5.12 X1.B12
RESET: IC26.1 IC30.10 IC32.3 IC32.4 IC32.8 IC32.11 IC36.5 IC37.1
RUN: IC24.2 IC32.1 IC32.5 IC38.2
SINGLE-STEP-CLK: IC38.13 SS-SEL.2
SINGLE-STEP/WAIT: IC29.1 IC29.5 IC38.12
SOFT-HALT: IC25.5 IC28.15
SPARE3: IC16.6 JP2.2
SRC-ADDR: IC17.5 IC18.1
U-2-BYTE-OPERAND-SEL: IC16.17 SV1.10
U-AC-LD: IC28.4 SV1.7
U-AC-LD-INV: IC7.18 SV1.3
U-AC-RD: IC28.3 SV1.5
U-ALU-FUNC: IC7.7 SV2.34
U-BRANCH-RD: IC16.3 SV1.35
U-HL-SWAP: IC28.13 SV1.13
U-INT-JMP: IC16.13 SV1.6
U-INTA: IC17.3 SV1.19
U-IO-ADDR-LD: IC7.3 SV2.30
U-IO-RD: IC14.7 SV2.39
U-IO-WR: IC14.8 SV2.4
U-MEM-RD: IC14.3 SV2.35
U-MEM-WR: IC14.4 SV2.37
U-REG-DN: IC12.17 SV2.31
U-REG-FUNC-LD: IC20.4 SV2.5
U-REG-FUNC-RD: IC20.3 SV2.3
U-REG-RD-HI: IC12.13 SV2.27
U-REG-RD-LO: IC12.7 SV2.23
U-REG-UP: IC12.18 SV2.33
U-SR-LD: IC28.7 SV1.9
U-TMP-REG-LD0: IC14.14 SV2.8
U-TMP-REG-LD1: IC14.18 SV2.12
U-TMP-REG-RD0: IC14.13 SV2.6
U-TMP-REG-RD1: IC14.17 SV2.10
U-VMA: IC7.4 SV2.32
UADDR-REG-ID0: IC19.3 SV2.14
UADDR-REG-ID1: IC19.4 SV2.16
UADDR-REG-ID2: IC19.7 SV2.18
UADDR-REG-ID3: IC19.8 SV2.20
UALU0: IC7.8 SV2.36
UALU1: IC7.13 SV2.38
UALU2: IC7.14 SV2.40
UALU3: IC7.17 SV1.1
UBR-TEST: IC28.8 SV1.11
UBRANCH-LD-HI: IC16.8 SV1.4
UBRANCH-LD-LO: IC16.4 SV1.37
UCODE-CLK: IC26.6 IC38.5
UCODE-COUNT-RESET: IC17.16 IC24.13 IC27.4 IC30.2 JP4.3
UDEST-ADDR: IC16.18 JP1.4
UINT-EN: IC17.13 SV1.27
UINT-LD-HI: IC17.7 SV1.23
UINT-LD-LO: IC16.14 SV1.21
UINT-START: IC17.8 SV1.25
UIO-ADDR0: IC19.13 SV2.22
UIO-ADDR1: IC19.14 SV2.24
UIO-ADDR2: IC19.17 SV2.26
UIO-ADDR3: IC19.18 SV2.28
ULD-INS-REG: IC17.14 SV1.29
UOPERAND-CLK: IC17.18 SV1.33
UOUT-OFF: IC28.17 SV1.15
UOUT-ON: IC28.18 SV1.17
UREG-LD-HI: IC12.14 SV2.29
UREG-LD-ID0: IC20.17 SV2.15
UREG-LD-ID1: IC20.18 SV2.17
UREG-LD-ID2: IC12.3 SV2.19
UREG-LD-ID3: IC12.4 SV2.21
UREG-LD-LO: IC12.8 SV2.25
UREG-RD-ID0: IC20.7 SV2.7
UREG-RD-ID1: IC20.8 SV2.9
UREG-RD-ID2: IC20.13 SV2.11
UREG-RD-ID3: IC20.14 SV2.13
USOFT-HALT: IC28.14 SV1.8
USPARE3: IC16.7 JP1.1
USRC-ADDR: IC17.4 JP1.3
UUCODE-COUNT-RESET: IC17.17 SV1.31
VCC: C1.1 C2.1 C3.1 C4.1 C5.1 C6.1 C7.1 C8.1 C9.1 C10.1 C11.1 C12.1 C13.1 C14.1 C15.1 C16.1 C17.1 C18.1 C19.1 C20.1 C21.1 C22.1 C23.1 C24.1 C25.1 C26.1 C27.1 C28.1 C29.1 C30.1 C31.1 C32.1 C33.1 C34.1 C35.1 C36.1 C37.1 C38.1 IC1.2 IC1.4 IC1.6 IC1.8 IC1.11 IC1.13 IC1.15 IC1.17 IC1.20 IC2.20 IC3.20 IC4.20 IC5.20 IC6.20 IC7.20 IC8.16 IC9.16 IC10.20 IC11.20 IC12.20 IC13.20 IC14.20 IC15.20 IC16.20 IC17.20 IC18.20 IC19.20 IC20.20 IC21.20 IC22.14 IC23.2 IC23.10 IC23.12 IC23.14 IC24.14 IC25.14 IC26.14 IC27.14 IC28.20 IC29.14 IC30.14 IC31.14 IC32.14 IC33.4 IC33.11 IC33.16 IC34.4 IC34.11 IC34.16 IC35.20 IC36.14 IC37.14 IC38.14 QG1.14 R1.2 R3.2 R4.2 R5.1 RESET.2 SS/WAIT.2 STEP-CLK.2 SV2.1 SV2.2 X1.A2 X1.A31 X1.B2 X1.B31 X1.C2 X1.C31

## Tracks (layer width: path | path; a pad name or v marks a point on that pad's centre or on a via)
-2-BYTE-OPERAND-SEL  (via drill 0.25)
  Top 0.127: v23.81,71.75 24.13,72.07 IC5.19 | v98.74,36.2 98.74,30.16 96.84,30.16 IC16.16 95.25,31.43 v92.39,28.57 | v147,42.86 147.96,43.81 147.96,75.56 IC31.3 | v51.44,71.12 53.66,71.12 53.98,71.44 58.74,71.44 58.74,66.67 61.28,64.14 61.28,45.72 66.04,40.96 73.34,40.96 v73.34,30.48
  Bottom 0.127: IC5.1 23.5,71.75 v23.81,71.75 40.96,71.75 41.27,72.07 50.48,72.07 v51.44,71.12 | v98.74,36.2 99.69,37.15 114.3,37.15 115.25,38.1 115.89,38.1 116.84,39.05 116.84,40.01 117.16,40.01 117.79,40.64 125.41,40.64 127.63,42.86 v147,42.86 | v73.34,30.48 73.98,31.11 83.5,31.11 86.04,28.57 v92.39,28.57
-AC-LD  (via drill 0.25)
  Top 0.127: IC28.5 135.57,7.3 130.49,7.3 130.49,10.16 127.95,12.7 122.56,12.7 122.56,11.75 118.43,7.62 114.3,7.62 v114.3,5.08 | v16.51,11.75 16.51,35.24 17.14,35.88 17.14,45.09 17.78,45.72 v17.78,69.85
  Bottom 0.127: v114.3,5.08 54.61,5.08 53.66,6.03 22.23,6.03 v16.51,11.75 | v17.78,69.85 17.14,70.48 10.79,70.48 X1.C22
-AC-LD-INV  (via drill 0.25)
  Top 0.127: IC7.19 20.32,104.14 20.32,101.92 15.24,96.84 15.24,75.56 13.34,73.66 v13.34,66.67
  Bottom 0.127: v13.34,66.67 12.7,66.04 X1.C20
-AC-RD  (via drill 0.25)
  Top 0.127: IC28.2 123.19,2.54 113.35,2.54 v113.35,3.81 | v20,7.62 17.78,9.84 17.78,45.09 20,47.31 20,56.2 20.32,56.52 20.32,62.87 18.41,64.77 v18.41,67.94
  Bottom 0.127: v113.35,3.81 112.71,4.45 41.27,4.45 40.32,5.4 22.23,5.4 v20,7.62 | v18.41,67.94 17.78,68.58 X1.C21
-ALU-FUNC  (via drill 0.25)
  Top 0.127: v16.51,86.36 16.51,69.85 15.24,68.58 v15.24,53.34
  Route2 0.127: IC7.6 30.16,96.2 22.54,96.2 17.14,90.81 17.14,87 v16.51,86.36
  Bottom 0.127: X1.C15 v15.24,53.34
-BRANCH-RD  (via drill 0.25)
  Top 0.127: v46.67,21.27 46.67,49.53 47.62,50.48 v47.62,84.14 | v68.26,98.74 63.18,98.74 63.18,101.6 62.87,101.92 60.64,101.92 60.64,99.06 60.33,98.74 58.1,98.74 58.1,101.6 57.79,101.92 55.56,101.92 55.56,86.04 IC13.1
  Bottom 0.127: IC16.2 84.14,20.64 57.15,20.64 56.52,21.27 v46.67,21.27 | v47.62,84.14 48.58,85.09 IC13.1 | IC21.1 84.14,99.38 78.74,99.38 78.1,98.74 v68.26,98.74
-BUS-EN  (via drill 0.25)
  Top 0.127: IC35.19 157.48,13.97 IC35.1 | IC36.8 181.29,33.97 v181.29,15.24 | v50.16,69.85 50.16,94.61 54.61,99.06 IC14.1 | v16.51,88.27 16.51,95.25 IC7.1 | IC20.1 85.09,84.14 86.04,83.19 86.04,70.8 IC19.1 84.14,68.9 84.14,64.45 | IC15.1 83.82,10.16 83.82,20.95 83.5,21.27 83.5,22.54 | IC16.1 84.14,23.18 | 84.14,23.18 83.5,22.54 | 84.14,23.18 84.14,33.02 85.09,33.97 IC17.1 84.14,40.32 84.14,64.45 | IC15.19 87.31,16.83 87.31,18.73 83.5,22.54 | IC12.1 55.56,68.9 v55.56,64.45 | 84.14,64.45 v81.28,64.45
  Bottom 0.127: IC28.1 128.59,10.48 153.99,10.48 155.57,8.89 IC35.1 | v181.29,15.24 180.97,14.92 161.61,14.92 IC35.19 158.43,18.1 118.75,18.1 118.43,17.78 108.9,17.78 108.59,18.1 89.22,18.1 IC15.19 | v50.16,69.85 IC12.1 | IC7.1 23.18,101.92 45.09,101.92 46.67,100.33 IC14.1 | X1.C28 12.06,88.27 v16.51,88.27 | v81.28,64.45 v55.56,64.45
-DO-INT  (via drill 0.25)
  Top 0.127: IC1.1 24.13,11.43 IC1.19 | IC36.2 179.39,46.67 v179.39,14.29 | v50.8,7.94 v56.2,2.54
  Bottom 0.127: v179.39,14.29 179.39,5.08 120.97,5.08 118.43,2.54 v56.2,2.54 | v50.8,7.94 48.26,10.48 23.18,10.48 IC1.1
-FP-HALT  (via drill 0.25)
  Top 0.127: IC31.1 153.99,86.68 158.11,86.68 158.43,86.36 158.43,80.64 155.89,78.11 v155.89,38.42 | R4.1 199.39,48.26 199.39,38.73 214.95,23.18 214.95,20 215.9,19.05 HALT.2
  Bottom 0.127: v155.89,38.42 187.96,38.42 199.07,49.53 R4.1
-HALT-CONT  (via drill 0.25)
  Top 0.127: v198.75,82.55 199.39,81.92 199.39,57.78 201.93,55.24 201.93,47.62 | 201.93,47.62 201.93,45.72 R3.1 | 201.93,47.62 214.95,34.61 214.95,33.97 215.9,33.02 CONT.2
  Bottom 0.127: IC31.9 166.69,94.3 177.8,94.3 183.51,88.58 192.72,88.58 v198.75,82.55
-HL-SWAP  (via drill 0.25)
  Top 0.127: v121.28,12.7 118.75,10.16 114.62,10.16 v113.66,11.11 | v13.97,12.7 4.45,12.7 4.45,16.83 3.81,17.46 3.81,73.98 4.76,74.93 7.94,74.93 8.89,75.88 8.89,77.47 X1.C25
  Bottom 0.127: IC28.12 143.51,12.7 v121.28,12.7 | v113.66,11.11 84.77,11.11 83.19,12.7 v13.97,12.7
-INT  (via drill 0.25)
  Top 0.127: v185.42,53.02 186.37,52.07 186.37,30.8 -INT-PULLUP.2
  Bottom 0.127: X1.C13 20.64,48.26 20.96,48.58 40.64,48.58 41.27,49.21 85.41,49.21 86.04,48.58 114.94,48.58 115.25,48.26 123.51,48.26 126.37,45.4 146.05,45.4 151.76,51.12 180.97,51.12 182.88,53.02 v185.42,53.02 | JP3.3 199.39,22.86 -INT-PULLUP.2
-INT-JMP  (via drill 0.25)
  Top 0.127: v58.1,37.78 54.61,37.78 IC10.1
  Bottom 0.127: IC3.1 23.18,40.96 50.48,40.96 52.07,39.37 IC10.1 | IC16.12 107,33.34 107.63,33.34 108.27,33.97 108.27,34.92 73.03,34.92 70.17,37.78 v58.1,37.78
-INTA  (via drill 0.25)
  Top 0.127: IC17.2 87.31,39.69 v87.31,42.23 | v12.06,46.35 11.43,46.99 11.43,49.53 X1.C14
  Bottom 0.127: v87.31,42.23 86.36,43.18 77.47,43.18 75.88,44.77 53.66,44.77 52.7,45.72 50.48,45.72 48.89,44.13 21.27,44.13 19.05,46.35 v12.06,46.35
-IO-ADDR-LD  (via drill 0.25)
  Top 0.127: v5.71,98.74 3.49,96.52 3.49,74.3 3.18,73.98 v3.18,56.52
  Bottom 0.127: IC7.2 22.54,98.74 v5.71,98.74 | v3.18,56.52 3.18,41.91 8.89,41.91 X1.C11
-IO-RD  (via drill 0.25)
  Top 0.127: v6.35,100.01 2.86,96.52 v2.86,83.19
  Bottom 0.127: IC14.6 65.72,101.92 53.02,101.92 52.7,101.6 46.04,101.6 44.45,103.19 21.91,103.19 18.73,100.01 v6.35,100.01 | v2.86,83.19 2.86,77.47 6.35,77.47 X1.B25
-IO-WR  (via drill 0.25)
  Top 0.127: v68.26,101.92 65.72,104.46 65.72,111.12 64.77,112.08 58.1,112.08 58.1,106.05 v51.75,99.69 | v6.03,87 6.35,86.68 6.35,82.55 X1.B26
  Bottom 0.127: IC14.9 73.34,101.92 v68.26,101.92 | v51.75,99.69 50.8,98.74 23.18,98.74 21.91,97.47 12.7,97.47 10.48,95.25 4.76,95.25 1.59,92.08 1.59,87.63 5.4,87.63 v6.03,87
-MEM-CPU-RESET  (via drill 0.25)
  Top 0.127: JP2.1 146.37,7.3 v146.37,53.66
  Bottom 0.127: v146.37,53.66 146.37,58.1 125.41,58.1 125.09,58.42 JP1.2
-MEM-RD  (via drill 0.25)
  Top 0.127: IC14.2 57.47,100.01 57.47,94.61 58.1,93.98 v58.1,75.25 | v11.43,75.25 10.79,75.25 10.48,74.93 8.57,74.93 8.57,74.61 X1.B23
  Bottom 0.127: v58.1,75.25 57.15,74.3 53.34,74.3 52.7,73.66 41.27,73.66 40.64,74.3 39.37,74.3 38.42,75.25 24.13,75.25 22.54,76.83 22.54,79.06 16.19,79.06 12.38,75.25 v11.43,75.25
-MEM-WR  (via drill 0.25)
  Route15 0.127: v24.77,98.11 12.06,85.41 12.06,79.06 10.48,77.47 8.89,77.47 X1.B24
  Bottom 0.127: IC14.5 62.55,98.11 v24.77,98.11
-ONE-OPERAND-SEL  (via drill 0.25)
  Top 0.127: IC4.1 22.54,55.56 22.54,60.64 IC4.19 | v113.03,83.19 112.71,82.87 v112.71,63.5
  Bottom 0.127: 86.04,63.82 IC18.19 | 86.04,63.82 25.72,63.82 IC4.19 | IC31.4 158.43,86.68 150.81,86.68 150.5,86.36 143.19,86.36 142.88,86.68 125.41,86.68 122.56,83.82 113.66,83.82 v113.03,83.19 | v112.71,63.5 112.4,63.82 86.04,63.82
-REG-DN  (via drill 0.25)
  Route15 0.127: IC12.16 58.1,70.8 58.1,69.22 57.15,68.26 v54.61,68.26
  Bottom 0.127: v54.61,68.26 53.98,67.63 18.73,67.63 18.41,67.31 8.89,67.31 X1.B21
-REG-FUNC-LD  (via drill 0.25)
  Top 0.127: IC20.5 91.76,81.6 v91.76,57.15 | v89.85,56.52 88.58,55.24 v88.58,3.81 | v8.26,15.56 6.35,17.46 6.35,34.29 X1.B8
  Bottom 0.127: v91.76,57.15 91.12,56.52 v89.85,56.52 | v88.58,3.81 37.47,3.81 36.51,4.76 19.05,4.76 v8.26,15.56
-REG-FUNC-RD  (via drill 0.25)
  Top 0.127: IC20.2 89.22,83.5 v89.22,66.36 | v80.33,66.36 80.01,66.04 80.01,40.64 81.28,39.37 81.28,33.02 73.98,25.72 v73.98,20
  Bottom 0.127: v80.33,66.36 v89.22,66.36 | v73.98,20 72.71,18.73 48.58,18.73 47.94,19.37 17.78,19.37 10.48,26.67 7.3,26.67 6.35,27.62 6.35,33.02 X1.B7
-REG-LD-HI  (via drill 0.25)
  Top 0.127: IC31.12 157.16,93.03 v157.16,95.57 | v118.11,91.44 114.62,91.44 v114.62,90.81
  Route15 0.127: v61.28,83.5 58.1,80.33 49.53,80.33 43.18,73.98 22.86,73.98 16.19,67.31 8.89,67.31 X1.B20
  Bottom 0.127: v157.16,95.57 156.53,96.2 123.19,96.2 118.43,91.44 v118.11,91.44 | v114.62,90.81 89.53,90.81 87.95,89.22 83.5,89.22 83.19,88.9 66.36,88.9 65.72,88.27 65.72,83.5 v61.28,83.5
-REG-LD-LO  (via drill 0.25)
  Top 0.127: v165.42,95.57 163.51,97.47 163.51,104.78 160.97,107.31 160.97,109.22 159.38,110.81 v128.27,110.81 | v55.24,112.71 50.8,108.27 v50.8,107.63 | v19.37,106.68 18.73,106.68 18.1,107.31 4.45,107.31 4.45,99.06 1.59,96.2 1.59,78.11 v2.86,76.83
  Bottom 0.127: v165.42,95.57 IC31.10 | v128.27,110.81 126.37,112.71 v55.24,112.71 | v50.8,107.63 48.89,105.73 20.64,105.73 19.68,106.68 v19.37,106.68 | v2.86,76.83 2.86,59.69 6.35,59.69 X1.B18
-REG-RD-HI  (via drill 0.25)
  Top 0.127: v12.06,71.12 10.79,69.85 8.89,69.85 8.89,64.77 X1.B19
  Route2 0.127: IC12.12 70.8,73.34 49.21,73.34 v48.89,73.03
  Bottom 0.127: v48.89,73.03 48.58,72.71 27.94,72.71 27.62,73.03 21.59,73.03 19.68,71.12 v12.06,71.12
-REG-RD-LO  (via drill 0.25)
  Top 0.127: IC12.6 68.26,68.9 v68.26,58.74
  Bottom 0.127: v68.26,58.74 53.02,58.74 52.7,58.42 47.94,58.42 46.99,57.47 20.64,57.47 19.68,58.42 11.75,58.42 10.48,59.69 8.89,59.69 X1.B17
-REG-UP  (via drill 0.25)
  Top 0.127: v54.93,79.69 IC12.19
  Route15 0.127: v28.89,79.69 28.26,79.06 20.64,79.06 11.43,69.85 8.89,69.85 X1.B22
  Bottom 0.127: v28.89,79.69 v54.93,79.69
-RESET  (via drill 0.25)
  Top 0.127: IC9.1 53.66,23.18 53.66,9.84 IC8.1 54.61,8.57 56.83,6.35 56.83,1.91 v109.54,1.91 | IC36.6 178.12,37.78 v178.12,21.27 | v17.78,92.08 20.32,92.08 v20.32,63.5 | v44.13,58.74 43.5,58.1 43.5,50.16 46.04,47.62 v46.04,24.77
  Bottom 0.127: v178.12,21.27 181.93,17.46 181.93,4.45 120.97,4.45 118.43,1.91 v109.54,1.91 | X1.C30 17.14,91.44 v17.78,92.08 | v20.32,63.5 20.32,58.74 v44.13,58.74 | v46.04,24.77 46.67,24.13 IC9.1
-SR-LD  (via drill 0.25)
  Top 0.127: v134.62,3.81 IC28.6 | v109.54,1.27 37.78,1.27 37.78,3.49 34.29,6.99 14.61,6.99 v14.61,73.66
  Bottom 0.127: v134.62,3.81 132.08,1.27 v109.54,1.27 | X1.C23 v14.61,73.66
-TMP-REG-LD0  (via drill 0.25)
  Top 0.127: v14.92,104.14 6.98,104.14 6.98,97.47 6.35,96.84 6.35,87.63 X1.B28
  Bottom 0.127: IC14.15 65.72,109.54 53.34,109.54 48.89,105.09 20.64,105.09 19.68,104.14 v14.92,104.14
-TMP-REG-LD1  (via drill 0.25)
  Top 0.127: IC14.19 53.66,104.46 53.66,102.55 v48.58,97.47
  Bottom 0.127: v48.58,97.47 47.94,96.84 14.61,96.84 10.48,92.71 8.89,92.71 X1.B30
-TMP-REG-RD0  (via drill 0.25)
  Top 0.127: IC14.12 73.98,107 v73.98,104.46 | v12.38,101.6 8.89,98.11 8.89,90.49 8.57,90.17 8.57,89.53 8.89,89.22 8.89,85.09 X1.B27
  Bottom 0.127: v73.98,104.46 53.02,104.46 52.7,104.14 22.23,104.14 19.68,101.6 v12.38,101.6
-TMP-REG-RD1  (via drill 0.25)
  Top 0.127: v64.77,111.44 IC14.16 | v18.1,106.68 11.43,100.01 11.43,91.12 10.48,90.17 9.21,90.17 v9.21,89.53
  Bottom 0.127: v64.77,111.44 38.42,111.44 36.51,109.54 20.96,109.54 v18.1,106.68 | v9.21,89.53 8.57,88.9 X1.B29
-VMA  (via drill 0.25)
  Top 0.127: IC7.5 27.62,96.2 v27.62,72.39 | v17.14,45.72 v17.14,69.22
  Bottom 0.127: v27.62,72.39 21.59,72.39 18.41,69.22 v17.14,69.22 | X1.C12 v17.14,45.72
ADDR-REG-ID0  (via drill 0.25)
  Top 0.127: v59.69,65.09 IC11.18 58.74,61.28 58.74,31.11 53.66,26.04 53.66,24.45 v47.94,18.73 | v89.22,65.72 90.17,64.77 IC18.18 90.17,58.1 v90.49,57.78
  Bottom 0.127: v59.69,65.09 70.48,65.09 71.12,65.72 v89.22,65.72 | IC18.9 102.24,57.78 v90.49,57.78 | X1.C3 10.79,22.23 14.29,22.23 17.78,18.73 v47.94,18.73
ADDR-REG-ID1  (via drill 0.25)
  Top 0.127: v95.57,57.15 95.25,57.47 IC18.16 | v46.67,14.92 47.31,15.56 47.31,26.35 53.66,32.7 53.66,40.64 58.1,45.09 v58.1,60.01
  Bottom 0.127: 66.36,60.64 IC11.16 | 66.36,60.64 80.96,60.64 81.91,61.59 83.5,61.59 84.46,60.64 93.66,60.64 IC18.16 | IC18.7 97.79,57.15 v95.57,57.15 | X1.C4 8.89,24.13 8.89,21.59 13.97,21.59 20.64,14.92 v46.67,14.92 | v58.1,60.01 58.74,60.64 66.36,60.64
ADDR-REG-ID2  (via drill 0.25)
  Top 0.127: 70.8,63.18 71.12,63.5 v71.12,65.09 | 70.8,63.18 IC11.14 | v98.43,65.09 100.33,63.18 IC18.14 100.33,59.37 v97.47,56.52 | v47.31,26.99 50.16,29.84 50.16,38.1 54.29,42.23 v54.29,43.81 | v65.41,44.13 70.8,44.13 70.8,63.18
  Bottom 0.127: v98.43,65.09 v71.12,65.09 | IC18.5 97.16,56.52 v97.47,56.52 | X1.C5 15.88,27.94 18.41,25.4 19.68,25.4 20.32,26.04 20.32,26.99 v47.31,26.99 | v54.29,43.81 54.61,44.13 v65.41,44.13
ADDR-REG-ID3  (via drill 0.25)
  Top 0.127: IC11.12 75.88,61.28 v75.88,58.1 73.98,56.2 73.98,30.48 v73.34,29.84 | IC18.12 105.09,61.91 v105.09,58.42
  Bottom 0.127: v75.88,58.1 79.69,58.1 81.91,55.88 83.5,55.88 84.46,56.83 87.95,56.83 88.26,56.52 | IC18.3 88.26,56.52 | v105.09,58.42 90.17,58.42 88.26,56.52 | X1.C6 10.79,31.11 20,31.11 20.96,30.16 50.48,30.16 51.44,31.11 53.02,31.11 54.29,29.84 v73.34,29.84
ALU0  (via drill 0.25)
  Top 0.127: IC7.9 41.59,100.01 v41.59,97.47 | v28.26,97.47 24.45,97.47 24.45,95.25 22.54,93.34 v22.54,66.04 | v12.06,59.05 11.43,58.42 11.43,57.15 X1.C16
  Bottom 0.127: v28.26,97.47 v41.59,97.47 | v22.54,66.04 20.64,64.14 17.14,64.14 v12.06,59.05
ALU1  (via drill 0.25)
  Top 0.127: v36.51,102.55 IC7.12 | v30.48,102.55 22.54,102.55 22.54,97.47 17.14,92.08 v17.14,71.75
  Route2 0.127: v17.14,71.75 17.14,69.85 12.06,64.77 12.06,60.33 X1.C17
  Bottom 0.127: v30.48,102.55 v36.51,102.55
ALU2  (via drill 0.25)
  Top 0.127: IC7.15 33.97,107.63 33.97,102.23 32.7,100.97 32.7,95.89 30.16,93.34 v30.16,79.06
  Bottom 0.127: v30.16,79.06 30.16,75.88 26.04,75.88 25.08,76.83 25.08,79.69 14.29,79.69 12.06,77.47 7.3,77.47 6.35,76.52 6.35,74.93 4.76,74.93 3.81,73.98 3.81,62.23 8.89,62.23 X1.C18
ALU3
  Top 0.127: IC7.16 30.16,109.54 25.08,109.54 25.08,106.05 15.88,96.84 15.88,75.56 13.97,73.66 13.97,66.67 10.79,63.5 X1.C19
BR-COND  (via drill 0.25)
  Top 0.127: v95.57,97.47 92.39,97.47 88.58,93.66 v88.58,90.49
  Route2 0.127: v36.51,89.53 33.66,86.68 20.64,86.68 12.7,78.74 12.7,78.11 10.79,76.2 X1.C24
  Bottom 0.127: IC27.1 123.51,96.84 118.75,96.84 118.43,96.52 111.44,96.52 110.81,97.16 102.24,97.16 101.92,97.47 v95.57,97.47 | v88.58,90.49 84.14,90.49 83.19,91.44 78.42,91.44 77.47,90.49 53.66,90.49 52.7,91.44 45.4,91.44 43.5,89.53 v36.51,89.53
BR-TEST  (via drill 0.25)
  Top 0.127: v121.92,11.75 121.92,92.71 IC27.2
  Bottom 0.127: IC28.9 145.73,7.3 126.37,7.3 v121.92,11.75
BRANCH-LD-HI  (via drill 0.25)
  Top 0.127: IC16.9 103.82,22.54 99.38,22.54 99.38,40.32 96.2,43.5 96.2,48.9 91.12,53.98 91.12,55.88 88.58,58.42 88.58,81.28 86.04,83.82 v86.04,91.12
  Bottom 0.127: v86.04,91.12 84.14,91.12 82.55,92.71 IC13.11
BRANCH-LD-LO  (via drill 0.25)
  Top 0.127: v101.6,28.57 103.82,28.57 103.82,81.28 107,84.45 107,107 IC21.11
  Bottom 0.127: IC16.5 99.69,28.57 v101.6,28.57
BUS-LATCH-CLK  (via drill 0.25)
  Top 0.127: IC16.11 107,32.7 107,46.04 IC17.11 108.9,47.94 108.9,71.12 107.95,72.07 IC19.11 108.9,78.42 108.9,91.76 IC20.11 | IC28.11 149.54,16.83 v149.54,18.73 | v127.32,18.73 123.19,22.86 v123.19,29.21 | IC12.11 78.42,78.42 78.42,107 IC14.11
  Bottom 0.127: v127.32,18.73 v149.54,18.73 | v123.19,29.21 121.92,30.48 113.66,30.48 112.4,31.75 IC16.11 | IC25.11 133.03,79.06 118.75,79.06 118.43,78.74 109.22,78.74 IC19.11 106.36,79.06 84.46,79.06 82.87,77.47 IC12.11 | IC7.11 46.67,110.17 75.25,110.17 IC14.11
CADDR0  (via drill 0.25)
  Top 0.127: v155.57,18.73 147,27.3 v147,33.97 | SV1.14 v120.01,34.92
  Bottom 0.127: IC35.16 165.42,18.73 v155.57,18.73 | v147,33.97 146.05,34.92 v120.01,34.92
CADDR1  (via drill 0.25)
  Top 0.127: v172.72,35.24 IC35.14
  Bottom 0.127: v172.72,35.24 172.4,35.56 119.38,35.56 SV1.16
CADDR2  (via drill 0.25)
  Top 0.127: IC35.12 173.99,20.32 v173.99,23.18
  Bottom 0.127: v173.99,23.18 169.23,27.94 146.69,27.94 145.1,29.53 126.05,29.53 123.82,31.75 SV1.18
CADDR3  (via drill 0.25)
  Top 0.127: IC35.9 178.75,9.84 v178.75,22.54
  Bottom 0.127: v178.75,22.54 151.45,22.54 146.37,27.62 125.41,27.62 125.09,27.94 119.38,27.94 SV1.20
CADDR4  (via drill 0.25)
  Top 0.127: IC35.7 174.31,10.48 176.21,10.48 176.21,7.62 175.26,6.67 150.81,6.67 v150.81,21.91
  Bottom 0.127: v150.81,21.91 146.37,26.35 126.05,26.35 125.09,25.4 119.38,25.4 SV1.22
CADDR5  (via drill 0.25)
  Top 0.127: IC35.5 166.69,9.84 v166.69,18.1
  Bottom 0.127: v166.69,18.1 164.15,20.64 131.44,20.64 129.54,22.54 119.7,22.54 SV1.24
CADDR6  (via drill 0.25)
  Top 0.127: IC15.18 90.81,17.14 v90.81,20
  Bottom 0.127: v90.81,20 91.44,20.64 113.03,20.64 115.25,22.86 116.84,22.86 SV1.26
CADDR7  (via drill 0.25)
  Top 0.127: v95.25,18.73 IC15.16 | v114.62,18.41 115.25,17.78 118.11,17.78 SV1.28
  Bottom 0.127: v95.25,18.73 114.3,18.73 v114.62,18.41
CADDR8
  Bottom 0.127: IC15.14 101.92,14.92 114.94,14.92 115.25,15.24 116.84,15.24 SV1.30
CADDR9  (via drill 0.25)
  Top 0.127: v108.59,13.34 IC15.12 | v114.3,13.34 114.94,12.7 118.11,12.7 SV1.32
  Bottom 0.127: v114.3,13.34 v108.59,13.34
CADDR10  (via drill 0.25)
  Top 0.127: v108.9,12.38 IC15.9
  Bottom 0.127: v108.9,12.38 109.22,12.7 116.84,12.7 SV1.34
CADDR11
  Bottom 0.127: IC15.7 101.92,10.48 114.94,10.48 115.25,10.16 116.84,10.16 SV1.36
CADDR12
  Bottom 0.127: IC15.5 96.84,7.3 114.94,7.3 115.25,7.62 116.84,7.62 SV1.38
CADDR13  (via drill 0.25)
  Top 0.127: IC15.3 89.22,9.84 v89.22,29.21 | v113.35,30.16 113.35,50.48 114.3,51.44 114.3,52.39 115.25,53.34 118.11,53.34 SV1.2
  Bottom 0.127: v89.22,29.21 90.17,30.16 v113.35,30.16
CNT-CLK  (via drill 0.25)
  Top 0.127: IC35.18 161.61,17.46 161.61,20.32 158.43,23.5 158.43,26.04 153.35,31.11 153.35,51.44 148.59,56.2 v148.59,68.9
  Bottom 0.127: v148.59,68.9 140.65,76.83 140.65,79.06 136.53,79.06 135.57,78.11 135.57,75.88 131.13,75.88 IC25.13
COUNT-FAULT  (via drill 0.25)
  Top 0.127: v131.13,12.06 127.95,15.24 127.95,20.95 125.73,23.18 125.73,50.48 125.41,50.8 125.41,56.2 127.95,58.74 127.95,63.5 131.13,66.67 131.13,91.76 IC26.12
  Bottom 0.127: IC35.3 158.75,12.7 144.15,12.7 143.51,12.06 v131.13,12.06
COUNT-RESET
  Top 0.127: IC33.14 156.53,32.7 156.53,76.52 IC34.14
  Bottom 0.127: IC26.3 132.08,79.69 155.26,79.69 IC34.14
DATA0  (via drill 0.25)
  Top 0.127: IC2.2 25.72,25.72 25.72,38.42 IC3.3 | IC6.3 26.99,84.77 v26.99,82.55 | v58.74,82.23 59.69,83.19 IC13.3 | v12.06,78.11 12.06,72.39 7.3,72.39 6.35,71.44 6.35,64.77 X1.A19 5.08,62.23 10.48,62.23 12.7,60.01 v12.7,36.2 | v83.5,98.74 79.69,94.93 v79.69,82.23
  Bottom 0.127: IC10.3 IC10.2 55.56,37.78 28.26,37.78 IC3.3 23.5,36.2 v12.7,36.2 | IC21.3 IC21.2 86.04,98.74 v83.5,98.74 | v12.06,78.11 15.88,81.92 26.35,81.92 v26.99,82.55 27.3,82.23 v58.74,82.23 v79.69,82.23
DATA1  (via drill 0.25)
  Top 0.127: IC10.5 IC10.4 59.37,36.51 59.37,34.29 60.64,33.02 60.64,27.3 58.1,24.77 58.1,22.23 v56.52,20.64 | IC2.4 28.26,25.08 28.26,38.42 IC3.4 28.26,40.32 v28.26,66.99 28.26,84.14 IC6.4 | IC21.5 IC21.4 91.76,99.38 v91.76,97.47 | v62.23,97.47 61.28,96.52 61.28,86.04 IC13.4
  Bottom 0.127: v56.52,20.64 32.7,20.64 IC2.4 | IC6.4 30.8,83.5 60.64,83.5 IC13.4 | X1.A20 6.35,64.77 20.64,64.77 22.86,66.99 v28.26,66.99 | v62.23,97.47 v91.76,97.47
DATA2  (via drill 0.25)
  Top 0.127: IC10.7 IC10.6 v65.09,37.15 | IC2.6 35.24,25.08 35.24,32.7 36.2,33.66 36.2,37.47 36.83,38.1 | IC3.7 36.83,38.1 | 36.83,38.1 v37.78,37.15 | IC6.7 37.78,84.14 v37.78,82.87 | v12.06,69.85 12.7,70.48 v12.7,83.19 | IC21.6 96.2,98.74 96.2,95.89 93.66,93.34 93.66,90.49 89.85,86.68 86.68,86.68 86.68,83.82 v87.63,82.87 | v48.89,37.15 48.89,60.96 50.8,62.87 v50.8,82.87
  Bottom 0.127: v37.78,37.15 v48.89,37.15 v65.09,37.15 | IC21.7 IC21.6 | 67.63,82.87 v50.8,82.87 v37.78,82.87 30.8,82.87 30.48,83.19 v12.7,83.19 | IC13.7 67.63,82.87 | X1.A21 6.35,69.85 v12.06,69.85 | 67.63,82.87 v87.63,82.87
DATA3  (via drill 0.25)
  Top 0.127: v76.52,98.11 76.52,89.22 IC13.8 72.07,84.77 v72.07,81.6 | IC2.8 38.42,25.08 38.42,34.61 | 38.42,38.42 38.42,34.61 | IC3.8 38.42,38.42 | IC6.8 38.42,84.14 38.42,81.6 | 38.42,38.42 v38.42,74.61 38.42,81.6 | v70.17,37.15 IC10.8 | 38.42,34.61 v42.23,34.61 | 38.42,81.6 v39.69,81.6
  Bottom 0.127: v76.52,98.11 100.65,98.11 IC21.8 IC21.9 | IC10.9 IC10.8 | X1.A22 6.35,72.39 14.61,72.39 19.05,76.83 20,76.83 22.23,74.61 v38.42,74.61 | v70.17,37.15 67.63,34.61 v42.23,34.61 | v39.69,81.6 v72.07,81.6
DATA4  (via drill 0.25)
  Top 0.127: IC21.12 IC21.13 101.28,106.36 v101.28,96.84 | IC6.13 40.96,94.3 46.36,94.3 | 46.36,94.3 46.36,50.48 45.72,49.85 v45.72,48.58 | IC2.11 43.5,32.7 v43.5,48.26 | IC13.13 72.07,93.03 v72.07,96.2 | v51.12,96.2 46.36,96.2 46.36,94.3 | v13.34,77.79 14.61,79.06 v14.61,94.61
  Bottom 0.127: IC3.13 40.32,47.94 40.64,47.94 41.27,48.58 43.5,48.58 | 43.5,48.58 v45.72,48.58 70.8,48.58 IC10.13 IC10.12 | 43.5,48.58 v43.5,48.26 | X1.A23 5.71,74.3 6.67,74.3 7.3,74.93 10.48,74.93 v13.34,77.79 | v14.61,94.61 16.19,96.2 v51.12,96.2 v72.07,96.2 72.71,96.84 v101.28,96.84
DATA5  (via drill 0.25)
  Top 0.127: IC10.14 IC10.15 v64.45,49.85 | v35.24,33.34 35.24,37.15 35.88,37.78 35.88,46.04 IC3.14 36.83,48.9 v37.78,49.85 | v39.05,94.93 IC6.14 | v69.53,94.93 69.85,94.61 IC13.14 | X1.A24 6.35,77.47 6.35,79.06 7.3,80.01 12.06,80.01 v12.06,92.08 | IC21.15 91.12,101.28 91.12,98.11 v87.95,94.93 | v46.36,49.85 46.99,50.48 v46.99,94.93
  Bottom 0.127: v35.24,33.34 37.78,33.34 IC2.13 | v37.78,49.85 v46.36,49.85 v64.45,49.85 | IC21.14 IC21.15 | v12.06,92.08 12.7,92.71 19.37,92.71 21.59,94.93 v39.05,94.93 v46.99,94.93 v69.53,94.93 v87.95,94.93
DATA6  (via drill 0.25)
  Top 0.127: IC10.16 IC10.17 61.91,47.31 v61.91,50.48 | IC3.17 30.8,48.58 33.34,48.58 | 33.34,48.58 33.34,32.7 IC2.15 | v33.66,49.21 33.34,48.9 33.34,48.58 | IC21.16 IC21.17 88.58,103.82 v88.58,96.2 | IC6.17 29.53,93.03 v29.53,95.57 | v61.91,95.57 62.23,95.25 IC13.17 | v13.34,80.01 13.97,80.64 v13.97,93.34 | v48.26,95.57 v48.26,50.48
  Bottom 0.127: v61.91,50.48 v48.26,50.48 35.88,50.48 34.61,49.21 v33.66,49.21 | X1.A25 6.35,80.01 v13.34,80.01 | v13.97,93.34 16.19,95.57 v29.53,95.57 v48.26,95.57 v61.91,95.57 72.07,95.57 72.71,96.2 v88.58,96.2
DATA7  (via drill 0.25)
  Top 0.127: IC2.17 30.16,32.7 v30.16,45.4 | IC21.18 IC21.19 87.31,107.63 87.31,102.23 86.04,100.97 v86.04,94.3 | IC6.18 25.72,91.76 v25.72,82.55 25.72,81.28 25.08,80.64 25.08,60.96 23.18,59.05 23.18,46.67 v22.86,46.35
  Bottom 0.127: IC10.18 IC10.19 55.56,45.4 53.98,45.4 53.02,46.35 50.48,46.35 49.53,45.4 v30.16,45.4 28.26,45.4 IC3.18 25.08,45.4 23.5,45.4 22.86,46.04 v22.86,46.35 | IC6.18 28.26,94.3 58.1,94.3 | IC13.18 58.1,94.3 | X1.A26 6.35,82.55 v25.72,82.55 | 58.1,94.3 v86.04,94.3
DATA8
  Bottom 0.127: IC3.2 21.59,36.83 4.76,36.83 1.59,40.01 1.59,83.82 X1.A27 6.35,85.09 19.05,85.09 20.64,86.68 45.09,86.68 46.04,85.72 52.7,85.72 53.66,86.68 55.56,86.68 IC13.2
DATA9  (via drill 0.25)
  Top 0.127: IC3.5 31.43,39.05 v31.43,34.61
  Bottom 0.127: v31.43,34.61 10.79,34.61 10.48,34.29 4.76,34.29 0.95,38.1 0.95,86.36 X1.A28 6.03,86.36 7.3,87.63 10.48,87.63 11.75,88.9 60.96,88.9 IC13.5
DATA10  (via drill 0.25)
  Top 0.127: IC3.6 35.24,40.32 v35.24,79.06 v35.24,89.53 | IC13.6 64.45,82.23 v64.45,79.69
  Bottom 0.127: v35.24,89.53 33.66,91.12 20,91.12 19.68,91.44 17.78,91.44 16.51,90.17 6.35,90.17 X1.A29 | v64.45,79.69 63.82,79.06 v35.24,79.06
DATA11  (via drill 0.25)
  Top 0.127: v72.07,72.39 73.98,74.3 73.98,84.14 IC13.9 | v2.22,82.87 v2.22,88.58 | v49.53,56.83 50.16,56.2 v50.16,47.62
  Route2 0.127: IC3.9 v50.16,47.62 56.2,53.66 56.2,56.52 61.28,61.59 61.28,63.82 66.36,68.9 66.36,70.48 68.26,72.39 v72.07,72.39
  Bottom 0.127: v2.22,88.58 X1.A30 | v2.22,82.87 2.22,57.15 17.14,57.15 18.41,55.88 20,55.88 20.96,56.83 v49.53,56.83
DATA12  (via drill 0.25)
  Top 0.127: v41.59,42.55 41.59,46.67 IC3.12 40.96,47.94 40.96,59.05 v41.27,59.37 | v13.97,40.01 13.97,27.3 10.79,24.13 7.62,24.13 X1.B3 | v49.53,62.23 v49.53,92.08
  Bottom 0.127: v41.59,42.55 40.64,41.59 20.64,41.59 19.05,40.01 v13.97,40.01 | IC13.12 73.34,91.12 53.66,91.12 52.7,92.08 v49.53,92.08 | v49.53,62.23 46.67,59.37 v41.27,59.37
DATA13  (via drill 0.25)
  Top 0.127: v34.29,49.85 IC3.15 | v13.97,50.48 13.34,49.85 13.34,27.3 12.7,26.67 7.62,26.67 X1.B4 | IC13.15 66.99,92.39 66.99,88.27 66.36,87.63 65.72,87.63 65.72,93.98 65.41,94.3 63.18,94.3 63.18,80.64 61.28,78.74 v61.28,72.71 | v55.88,70.8 56.2,70.48 v56.2,52.39
  Bottom 0.127: v13.97,50.48 33.66,50.48 v34.29,49.85 34.61,49.85 36.51,51.75 50.16,51.75 50.8,52.39 v56.2,52.39 | v61.28,72.71 60.01,71.44 56.52,71.44 v55.88,70.8
DATA14  (via drill 0.25)
  Top 0.127: IC3.16 30.8,46.04 v30.8,28.89 | IC13.16 63.82,91.76 v63.82,52.39 | v54.93,51.75 49.53,46.35 49.53,31.11 v47.31,28.89
  Bottom 0.127: X1.B5 8.89,29.21 15.24,29.21 16.51,27.94 29.84,27.94 v30.8,28.89 v47.31,28.89 | v63.82,52.39 63.18,51.75 v54.93,51.75
DATA15  (via drill 0.25)
  Top 0.127: IC3.19 20.32,43.18 20.32,41.27 18.41,39.37 v18.41,33.34 | IC13.19 56.2,91.76 v56.2,88.27 | v19.68,86.36 17.78,84.45 17.78,70.48 15.88,68.58 v15.88,33.34
  Bottom 0.127: v18.41,33.34 16.83,31.75 15.88,31.75 | 15.88,31.75 8.89,31.75 X1.B6 | v56.2,88.27 55.24,87.31 53.66,87.31 52.7,86.36 46.04,86.36 45.09,87.31 20.64,87.31 v19.68,86.36 | 15.88,31.75 v15.88,33.34
DEST-ADDR  (via drill 0.25)
  Top 0.127: IC11.1 55.56,53.66 55.56,43.18 v54.93,42.55 | v87.31,36.83 87.63,36.51 IC16.19
  Bottom 0.127: v54.93,42.55 55.88,41.59 77.79,41.59 82.55,36.83 v87.31,36.83
DO-HALT  (via drill 0.25)
  Top 0.127: IC23.9 140.65,47.94 140.65,79.38 136.21,83.82 v136.21,88.58
  Bottom 0.127: v136.21,88.58 133.67,91.12 131.13,91.12 IC26.13
DO-INT  (via drill 0.25)
  Top 0.127: IC2.19 24.13,26.67 IC2.1 25.4,20.32 v25.4,18.1 | IC24.8 144.46,60.01 v144.46,51.12 144.46,39.05 v141.92,36.51 | v56.52,18.1 60.33,18.1 60.33,20 63.82,23.5 63.82,26.04 68.9,31.11 68.9,33.02 v72.39,36.51
  Bottom 0.127: v144.46,51.12 151.13,51.12 151.76,51.75 176.21,51.75 IC36.1 | v56.52,18.1 v25.4,18.1 | v72.39,36.51 73.34,35.56 118.43,35.56 119.38,36.51 v141.92,36.51
EXTERNAL-SINGLESTEP-CLK
  Top 0.127: JP4.2 212.72,43.81 212.72,55.24 SS-SEL.3
FP-CLKH  (via drill 0.25)
  Top 0.127: v187.64,47.94 189.23,49.53 189.23,78.74 R10.1 | STEP-CLK.3 203.83,100.97 v203.83,81.28
  Bottom 0.127: IC29.12 159.7,46.04 180.97,46.04 182.88,47.94 v187.64,47.94 | v203.83,81.28 191.77,81.28 R10.1
FP-CLKL  (via drill 0.25)
  Top 0.127: v192.41,51.44 198.12,57.15 198.12,82.55 R11.2 200.66,102.87 STEP-CLK.1
  Bottom 0.127: IC29.8 167.96,48.58 187.64,48.58 190.5,51.44 v192.41,51.44
FP-EXECUTE
  Top 0.127: RESET.3 202.56,69.22 202.56,61.59 R6.1
  Bottom 0.127: IC32.6 166.69,101.92 177.8,101.92 183.51,96.2 200.03,96.2 206.38,89.85 208.28,89.85 209.23,88.9 209.23,59.69 R6.1
FP-FREERUN  (via drill 0.25)
  Top 0.127: IC29.2 153.99,41.59 v153.99,55.88 | SS/WAIT.1 205.42,92.39 v205.42,79.69
  Bottom 0.127: v153.99,55.88 158.11,60.01 176.53,60.01 182.56,66.04 182.56,68.9 186.06,68.9 190.82,73.66 199.39,73.66 R9.2 v205.42,79.69
FP-HALT  (via drill 0.25)
  Top 0.127: IC24.12 133.03,63.18 v133.03,80.33 | v151.13,81.92 153.67,81.92 153.67,83.82 IC31.2
  Bottom 0.127: v133.03,80.33 134.62,81.92 v151.13,81.92
FP-HALT-CONT
  Top 0.127: IC31.8 161.61,98.74 158.43,98.74 158.43,107 IC32.12
FP-RESET  (via drill 0.25)
  Top 0.127: RESET.1 201.93,73.66 201.93,66.04 R7.2 | IC32.2 155.26,100.01 155.26,98.11 159.07,94.3 v159.07,82.55
  Bottom 0.127: v159.07,82.55 159.7,81.92 203.83,81.92 RESET.1
FP-SINGLE-STEP-CLK
  Bottom 0.127: IC29.11 IC29.10 164.15,46.67 166.05,46.67 166.05,48.9 167.64,50.48 184.78,50.48 186.37,52.07 SS-SEL.1
FP-SS  (via drill 0.25)
  Top 0.127: IC29.6 169.23,44.77 v169.23,53.66
  Bottom 0.127: v169.23,53.66 173.67,58.1 187.01,58.1 198.75,69.85 R8.1 208.6,69.85 208.6,79.38 208.28,79.69 207.01,79.69 SS/WAIT.3
FREE-RUN  (via drill 0.25)
  Top 0.127: IC29.3 IC29.4 160.97,41.59 160.97,58.42 v161.92,59.37 | IC38.10 186.37,90.49 v186.37,68.58
  Bottom 0.127: v186.37,68.58 186.37,59.37 v161.92,59.37
GND
  pour Route15: 1.27,113.03 217.17,113.03 217.17,1.27 1.27,1.27
HALT-CLR  (via drill 0.25)
  Top 0.127: v145.1,51.75 145.1,96.2 154.94,106.05 IC32.13
  Bottom 0.127: IC23.13 134.3,51.75 v145.1,51.75
HARD-RESET1
  Bottom 0.127: IC29.13 156.53,49.85 163.51,49.85 IC29.9
INT-EDGE  (via drill 0.25)
  Top 0.127: IC23.3 132.72,38.73 132.72,33.34 133.03,33.02 v133.03,26.99
  Bottom 0.127: v133.03,26.99 146.37,26.99 151.45,21.91 190.18,21.91 193.04,19.05 JP3.2
INT-EN  (via drill 0.25)
  Top 0.127: v113.98,45.09 114.3,44.77 v114.3,34.29 | v133.35,33.97 140.65,33.97 140.65,25.08 IC22.6
  Bottom 0.127: IC17.12 107.31,45.09 v113.98,45.09 | v114.3,34.29 114.3,33.02 126.05,33.02 127,33.97 v133.35,33.97
INT-LD-HI  (via drill 0.25)
  Top 0.127: IC3.11 45.4,46.04 v45.4,42.23
  Bottom 0.127: v45.4,42.23 46.04,41.59 50.48,41.59 51.44,40.64 53.66,40.64 53.98,40.96 75.56,40.96 76.52,40.01 76.52,36.2 94.62,36.2 IC17.6
INT-LD-LO  (via drill 0.25)
  Top 0.127: v94.93,42.23 96.52,40.64 96.52,33.02 IC16.15
  Bottom 0.127: IC10.11 78.74,45.72 84.14,45.72 86.04,43.81 87,43.81 88.58,42.23 v94.93,42.23
INT-LEVEL
  Top 0.127: IC36.13 185.74,47.94 185.74,26.35 193.04,19.05 198.75,19.05 198.75,22.23 JP3.4
INT-START  (via drill 0.25)
  Top 0.127: v103.19,41.27 101.92,42.55 101.92,59.37 v103.19,60.64
  Bottom 0.127: IC17.9 103.5,41.27 v103.19,41.27 | v103.19,60.64 123.51,60.64 123.82,60.96 126.05,60.96 126.37,60.64 148.91,60.64 149.22,60.96 151.45,60.96 151.76,60.64 163.51,60.64 IC30.9
IO-ADDR0  (via drill 0.25)
  Top 0.127: IC19.12 104.46,76.52 104.46,27.94 v101.6,25.08 | v12.06,27.3 11.43,27.94 11.43,28.26 10.48,29.21 8.89,29.21 8.89,31.75 X1.C7
  Bottom 0.127: v101.6,25.08 101.6,22.54 94.62,22.54 93.66,23.5 93.66,27.94 72.71,27.94 71.12,26.35 53.66,26.35 52.7,25.4 45.4,25.4 45.09,25.72 26.04,25.72 25.08,24.77 25.08,22.54 16.83,22.54 v12.06,27.3
IO-ADDR1  (via drill 0.25)
  Top 0.127: IC19.15 97.47,77.15 97.47,71.75 96.84,71.12 96.84,50.16 98.74,48.26 v98.74,43.5 | v80.65,39.37 74.61,33.34 v74.61,30.48 | v12.06,30.48 11.43,31.11 11.43,33.97 10.16,35.24 X1.C8
  Bottom 0.127: v98.74,43.5 96.2,40.96 84.14,40.96 82.55,39.37 v80.65,39.37 | v74.61,30.48 72.07,27.94 48.89,27.94 47.31,29.53 20.64,29.53 19.68,30.48 v12.06,30.48
IO-ADDR2  (via drill 0.25)
  Top 0.127: IC19.16 95.25,72.07 96.2,71.12 96.2,49.53 96.84,48.9 v96.84,43.5
  Bottom 0.127: v96.84,43.5 94.93,41.59 84.14,41.59 83.19,40.64 79.38,40.64 76.84,43.18 16.51,43.18 13.34,40.01 13.34,39.37 19.05,39.37 19.68,38.73 19.68,38.1 X1.C9
IO-ADDR3  (via drill 0.25)
  Top 0.127: IC19.19 86.68,76.52 86.68,44.13 86.04,43.5 v86.04,34.29 | v12.06,33.97 11.43,34.61 11.43,39.37 X1.C10
  Bottom 0.127: v86.04,34.29 85.72,33.97 v12.06,33.97
LADDR-REG-ID0  (via drill 0.25)